# Altium PCB ISL6236A_DEMO.PcbDoc (part 1 of 2)
Units mm, origin at the board's own origin, x right, y up, seen from the top; angles counter-clockwise.
Board outline 50 x 50 mm, 6 copper layers (Top Layer (L1), GND (L2), L3, L4, GND (L5), Bottom Layer (L6)), stack 0.876 mm thick; 41 components, 27 nets, 119 pads, 105 vias.
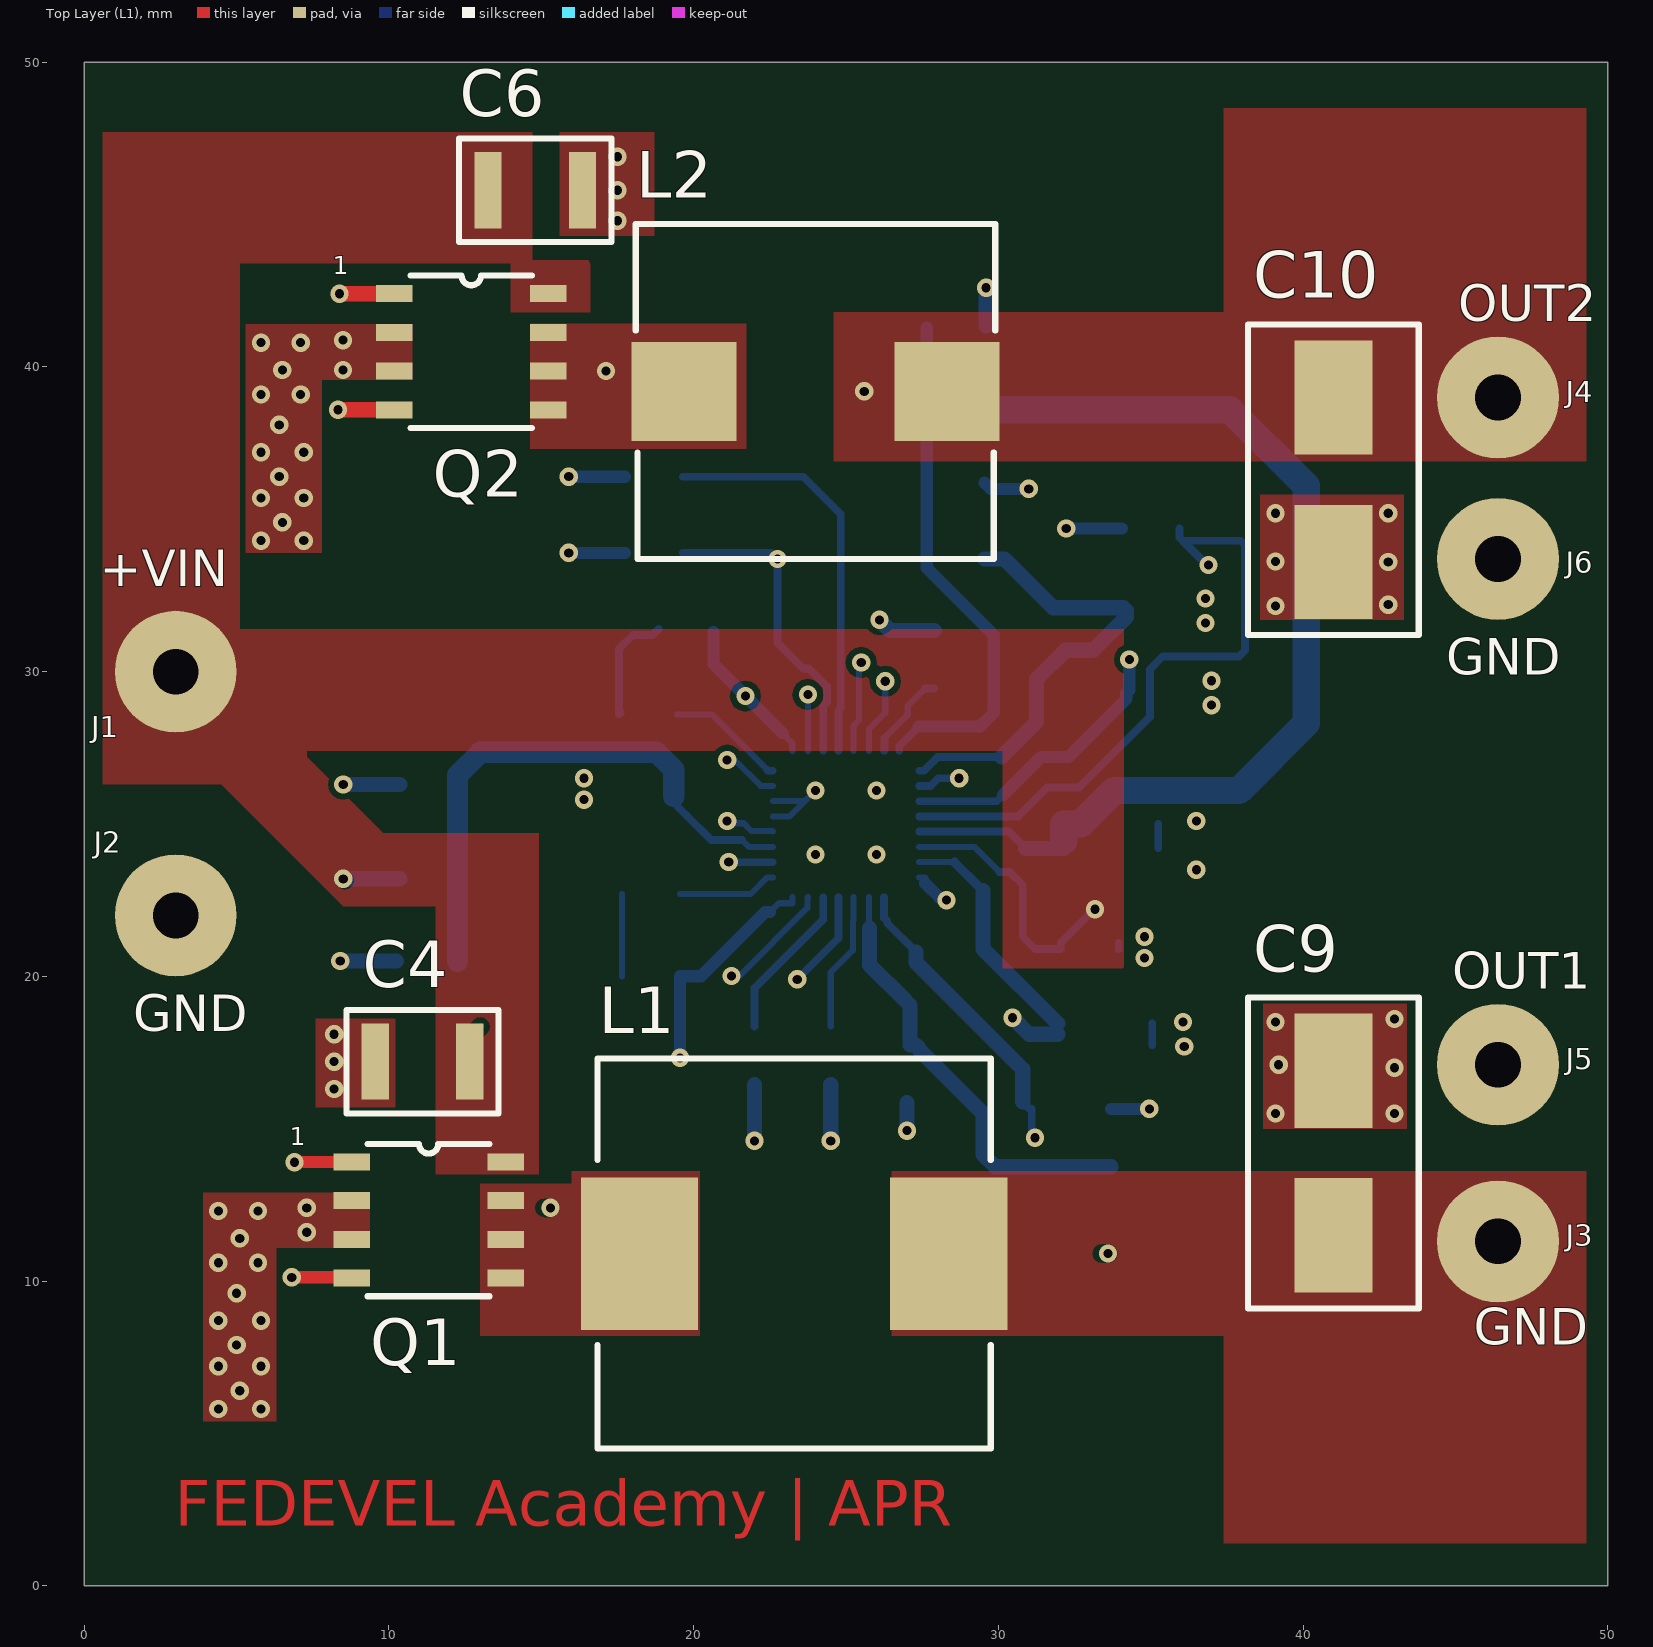
[diagram p0: Top Layer (L1) view]
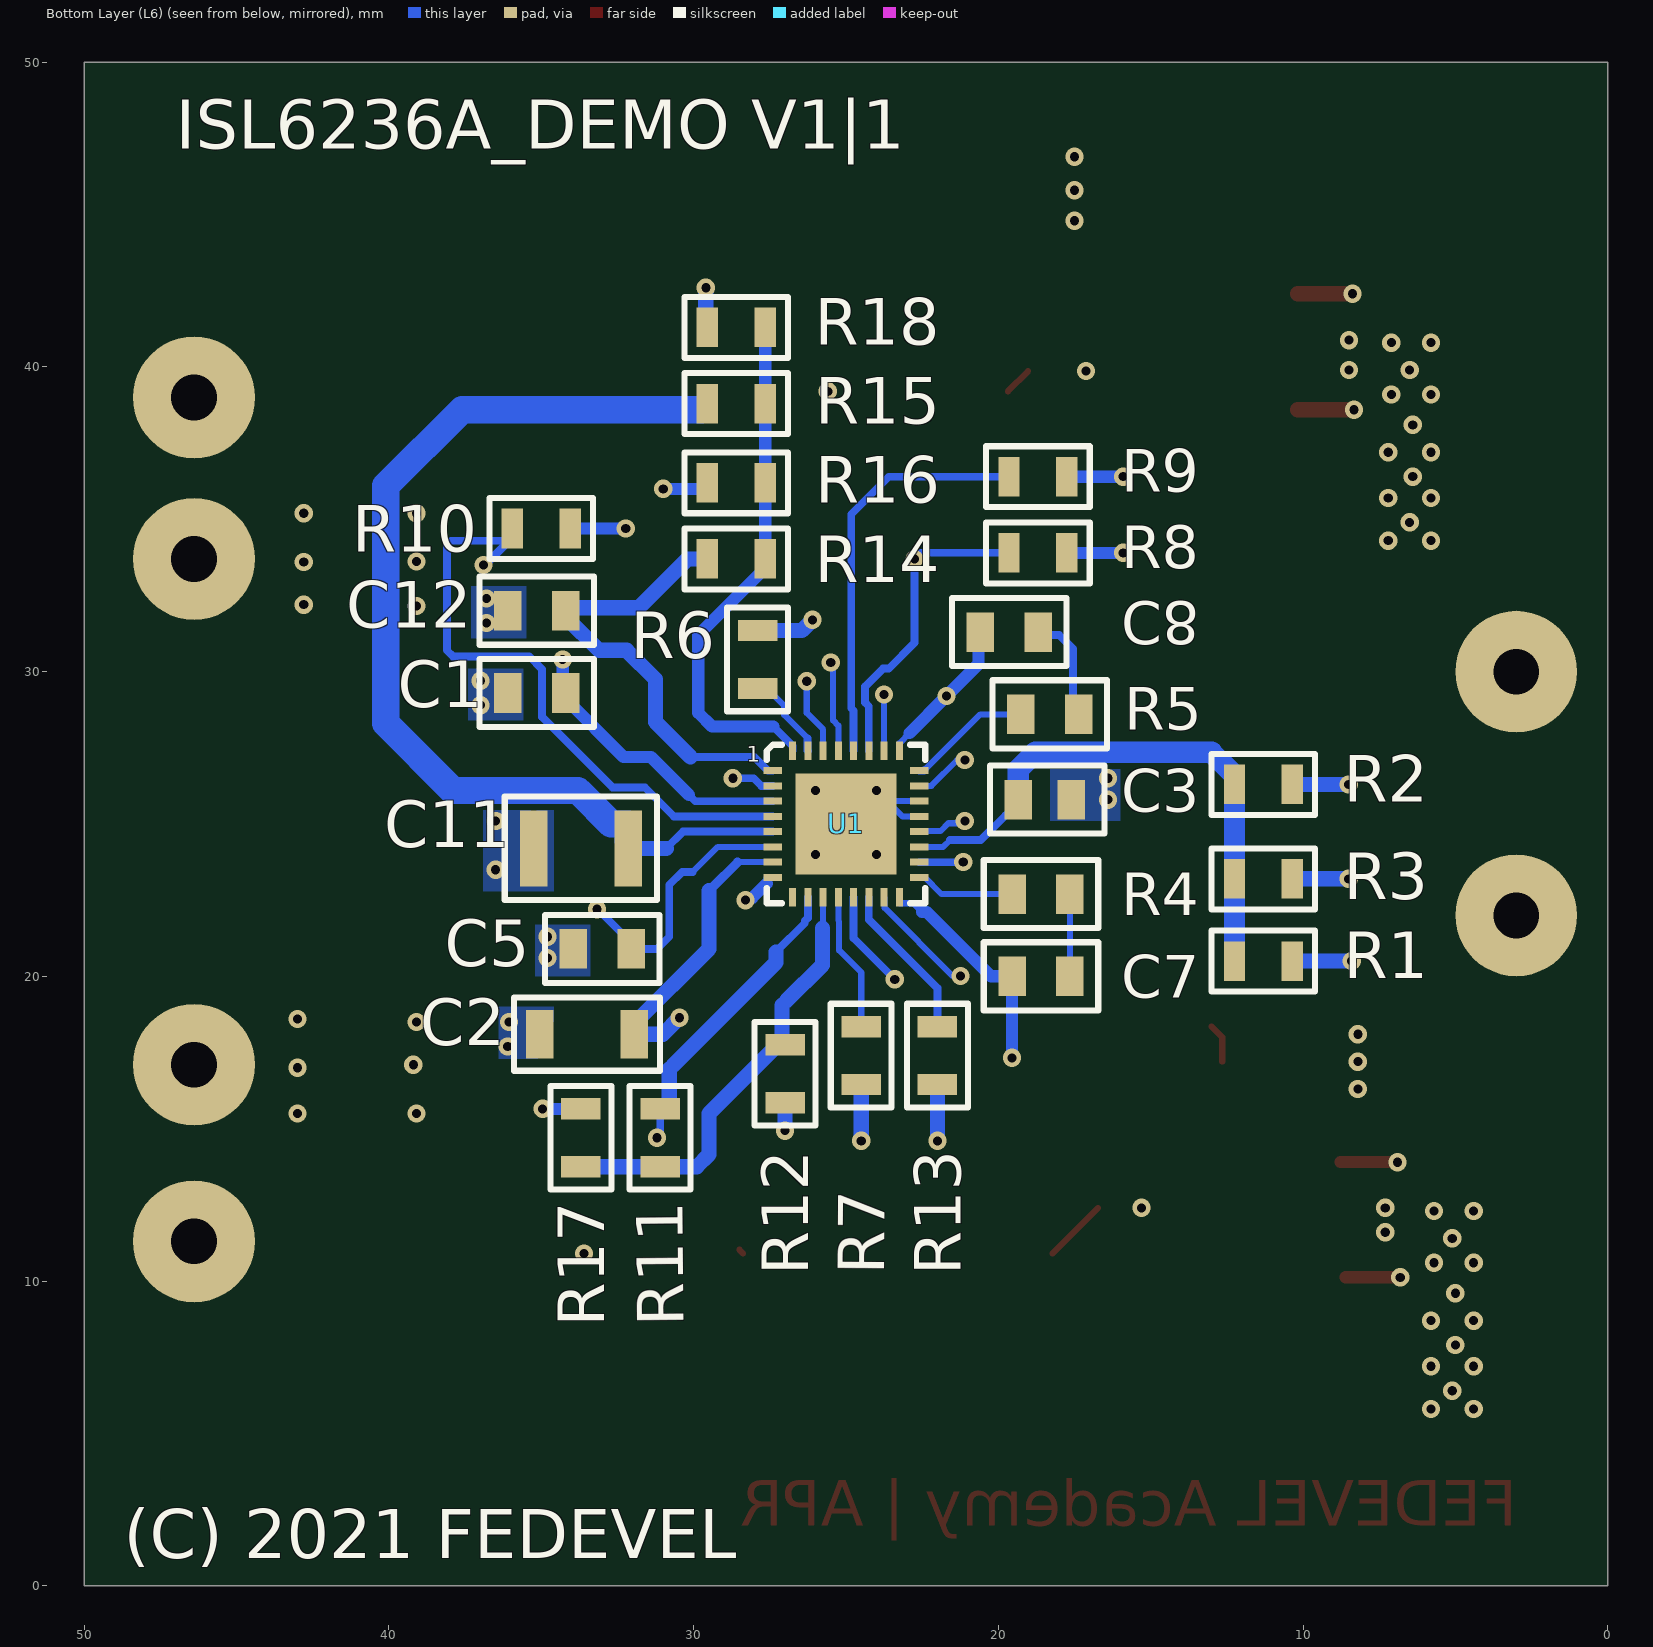
[diagram p1: Bottom Layer (L6) view, seen from below]
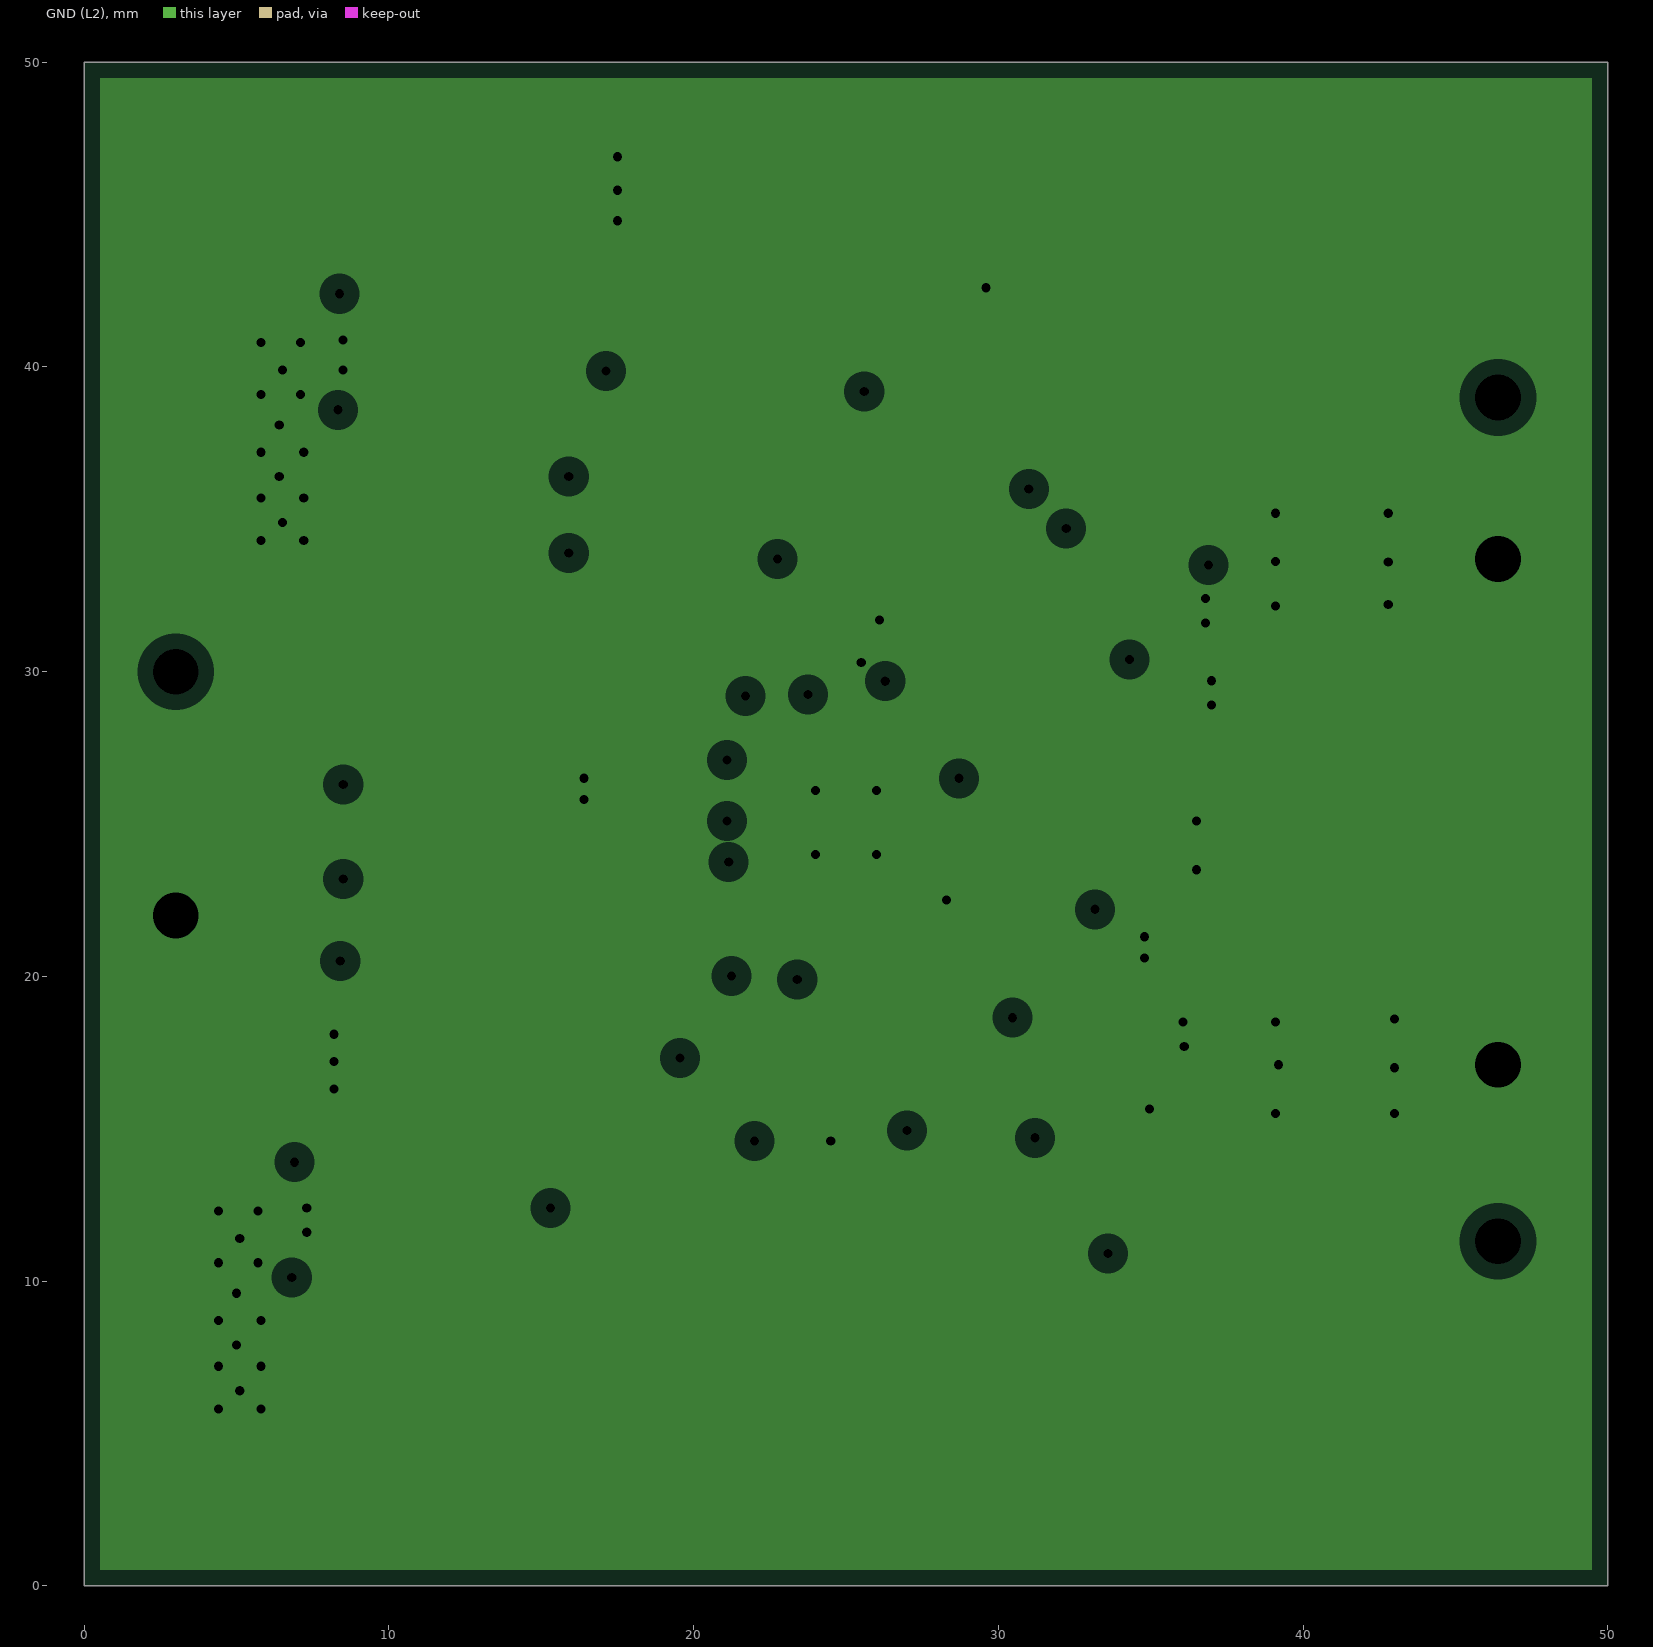
[diagram p2: GND (L2), clearances drawn from the general rule]
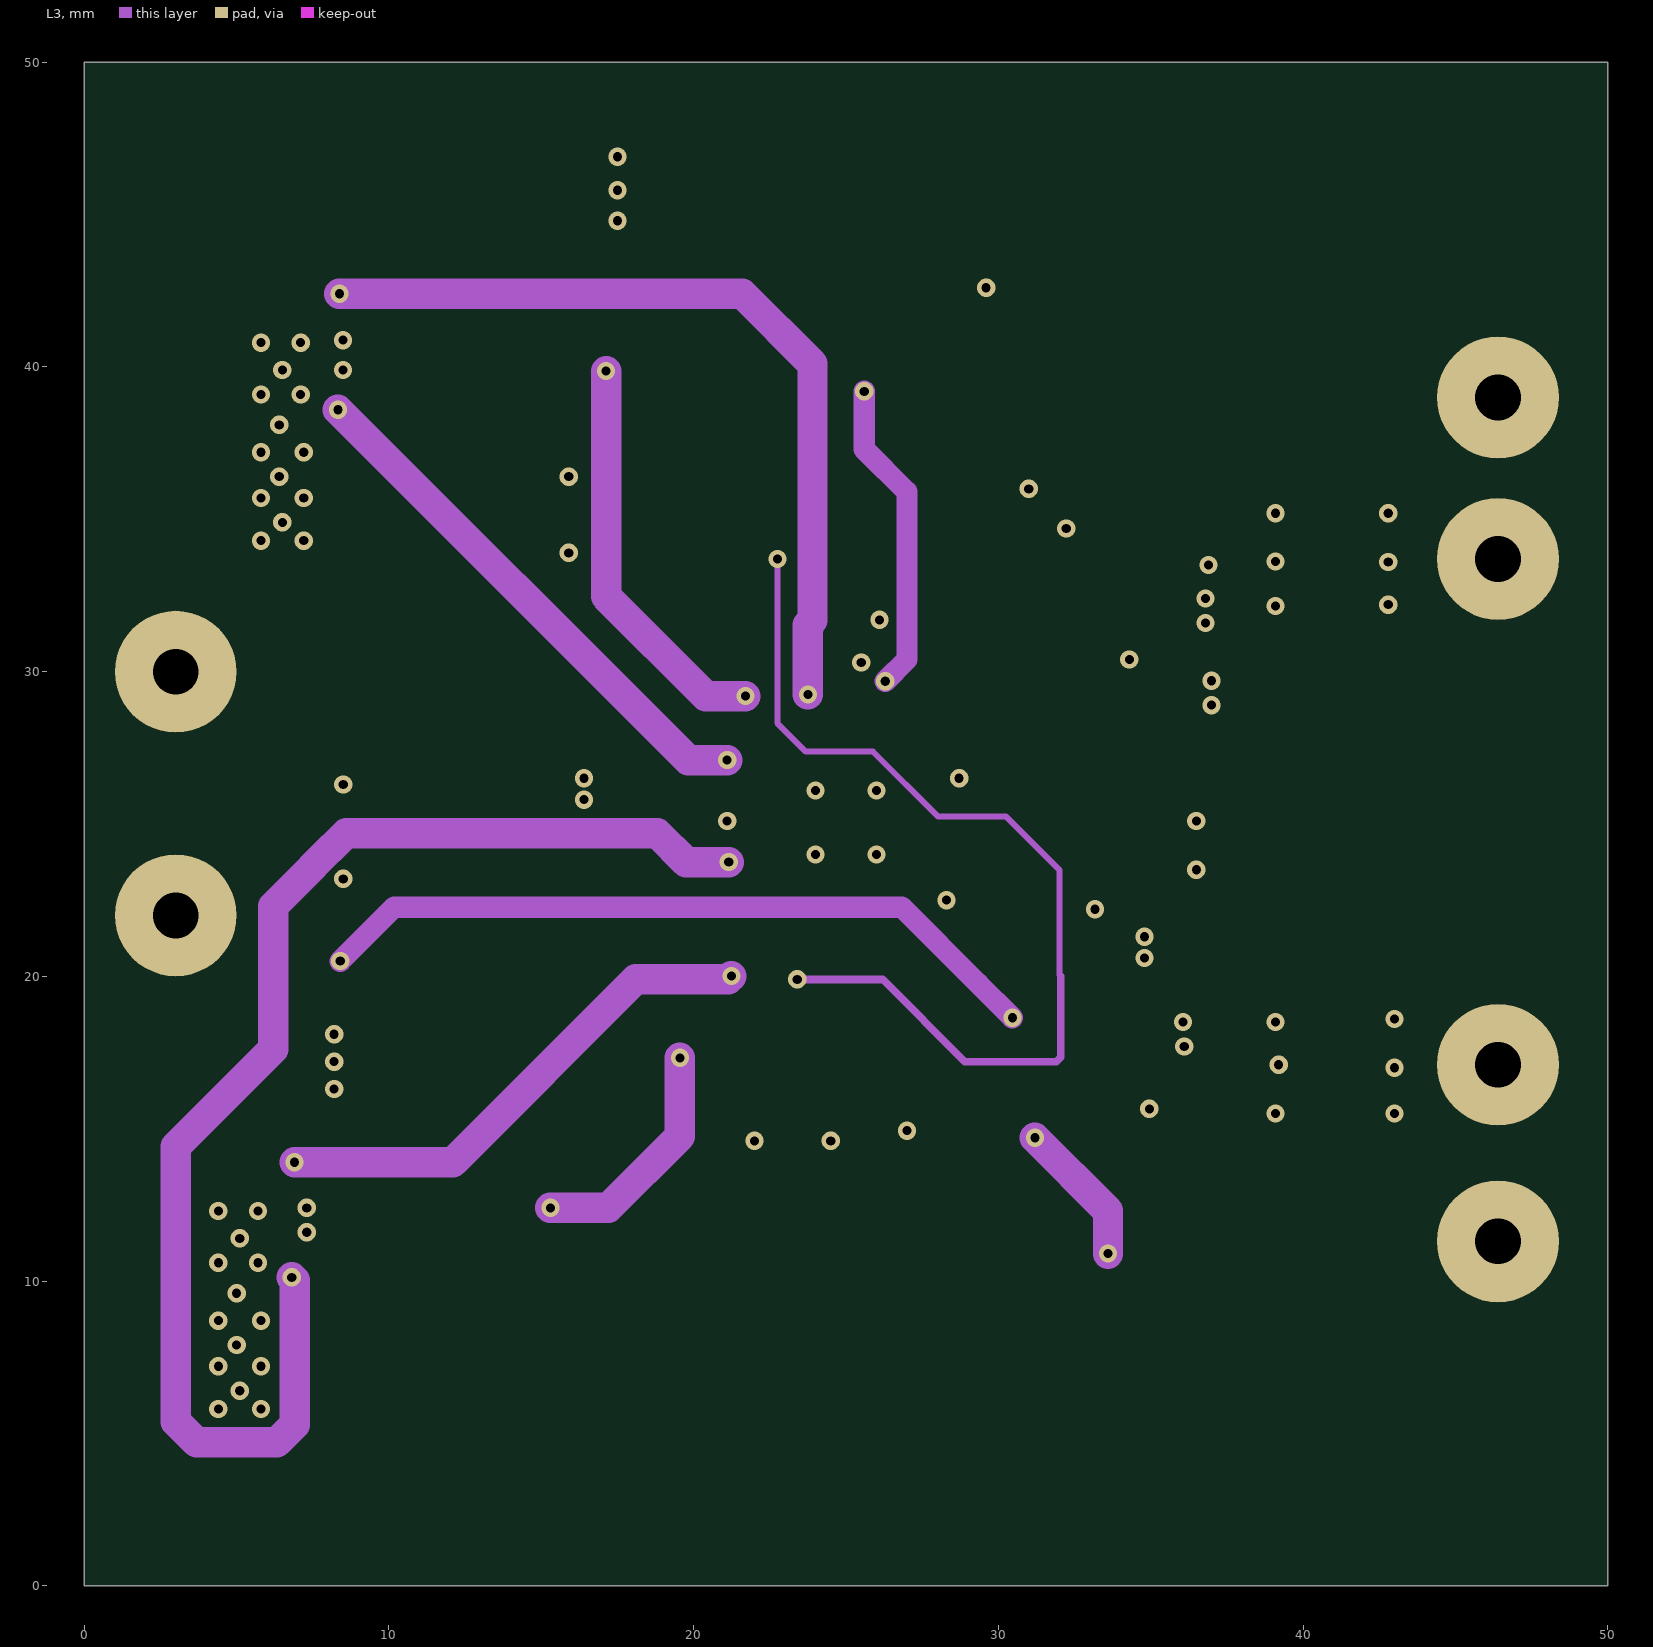
[diagram p3: L3]
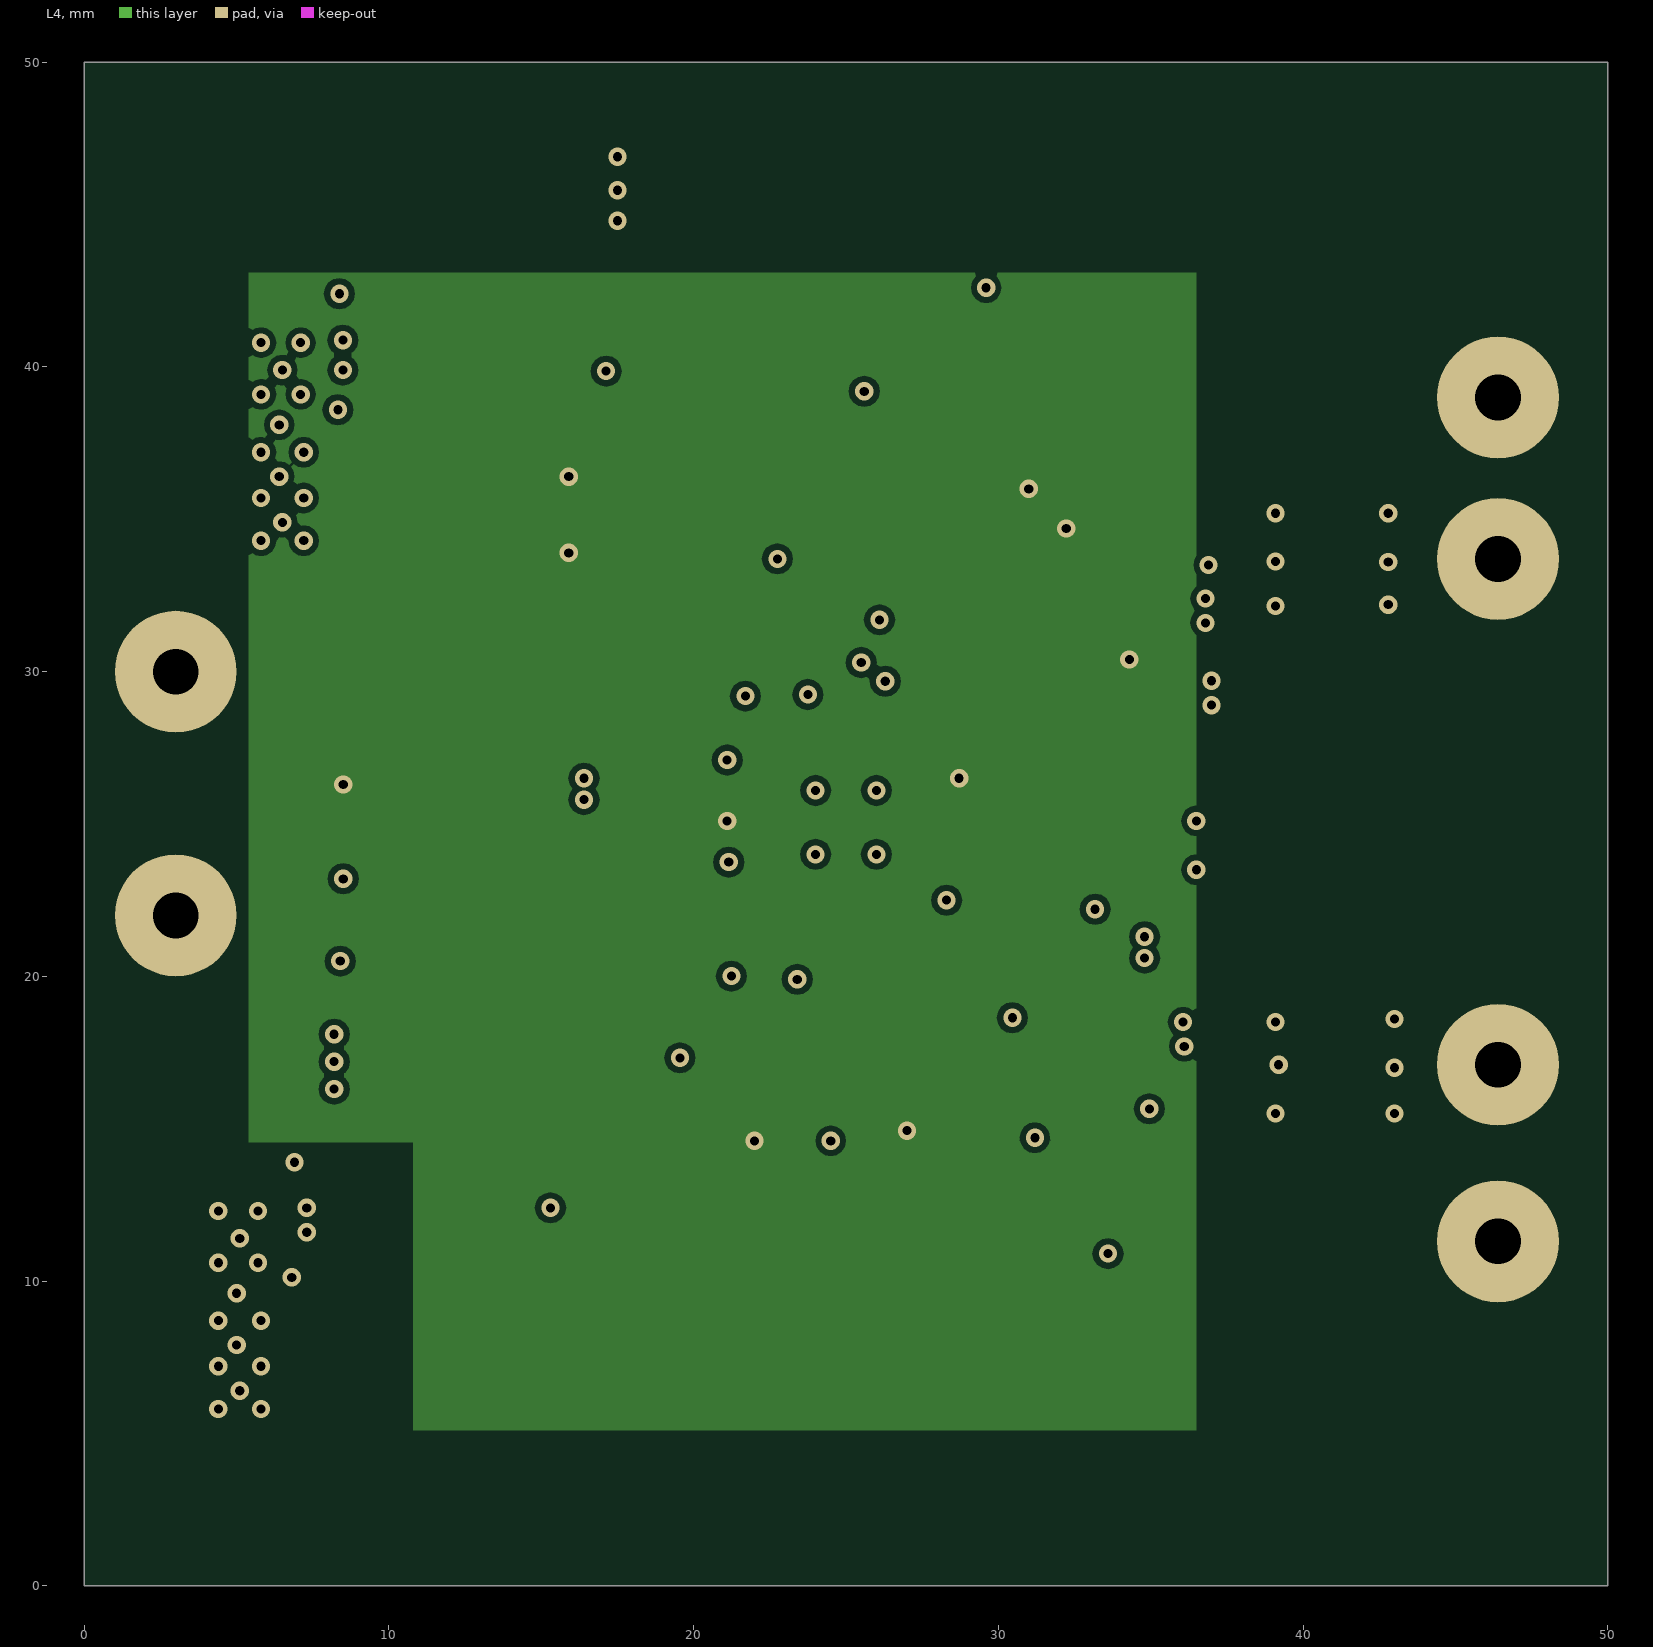
[diagram p4: L4]
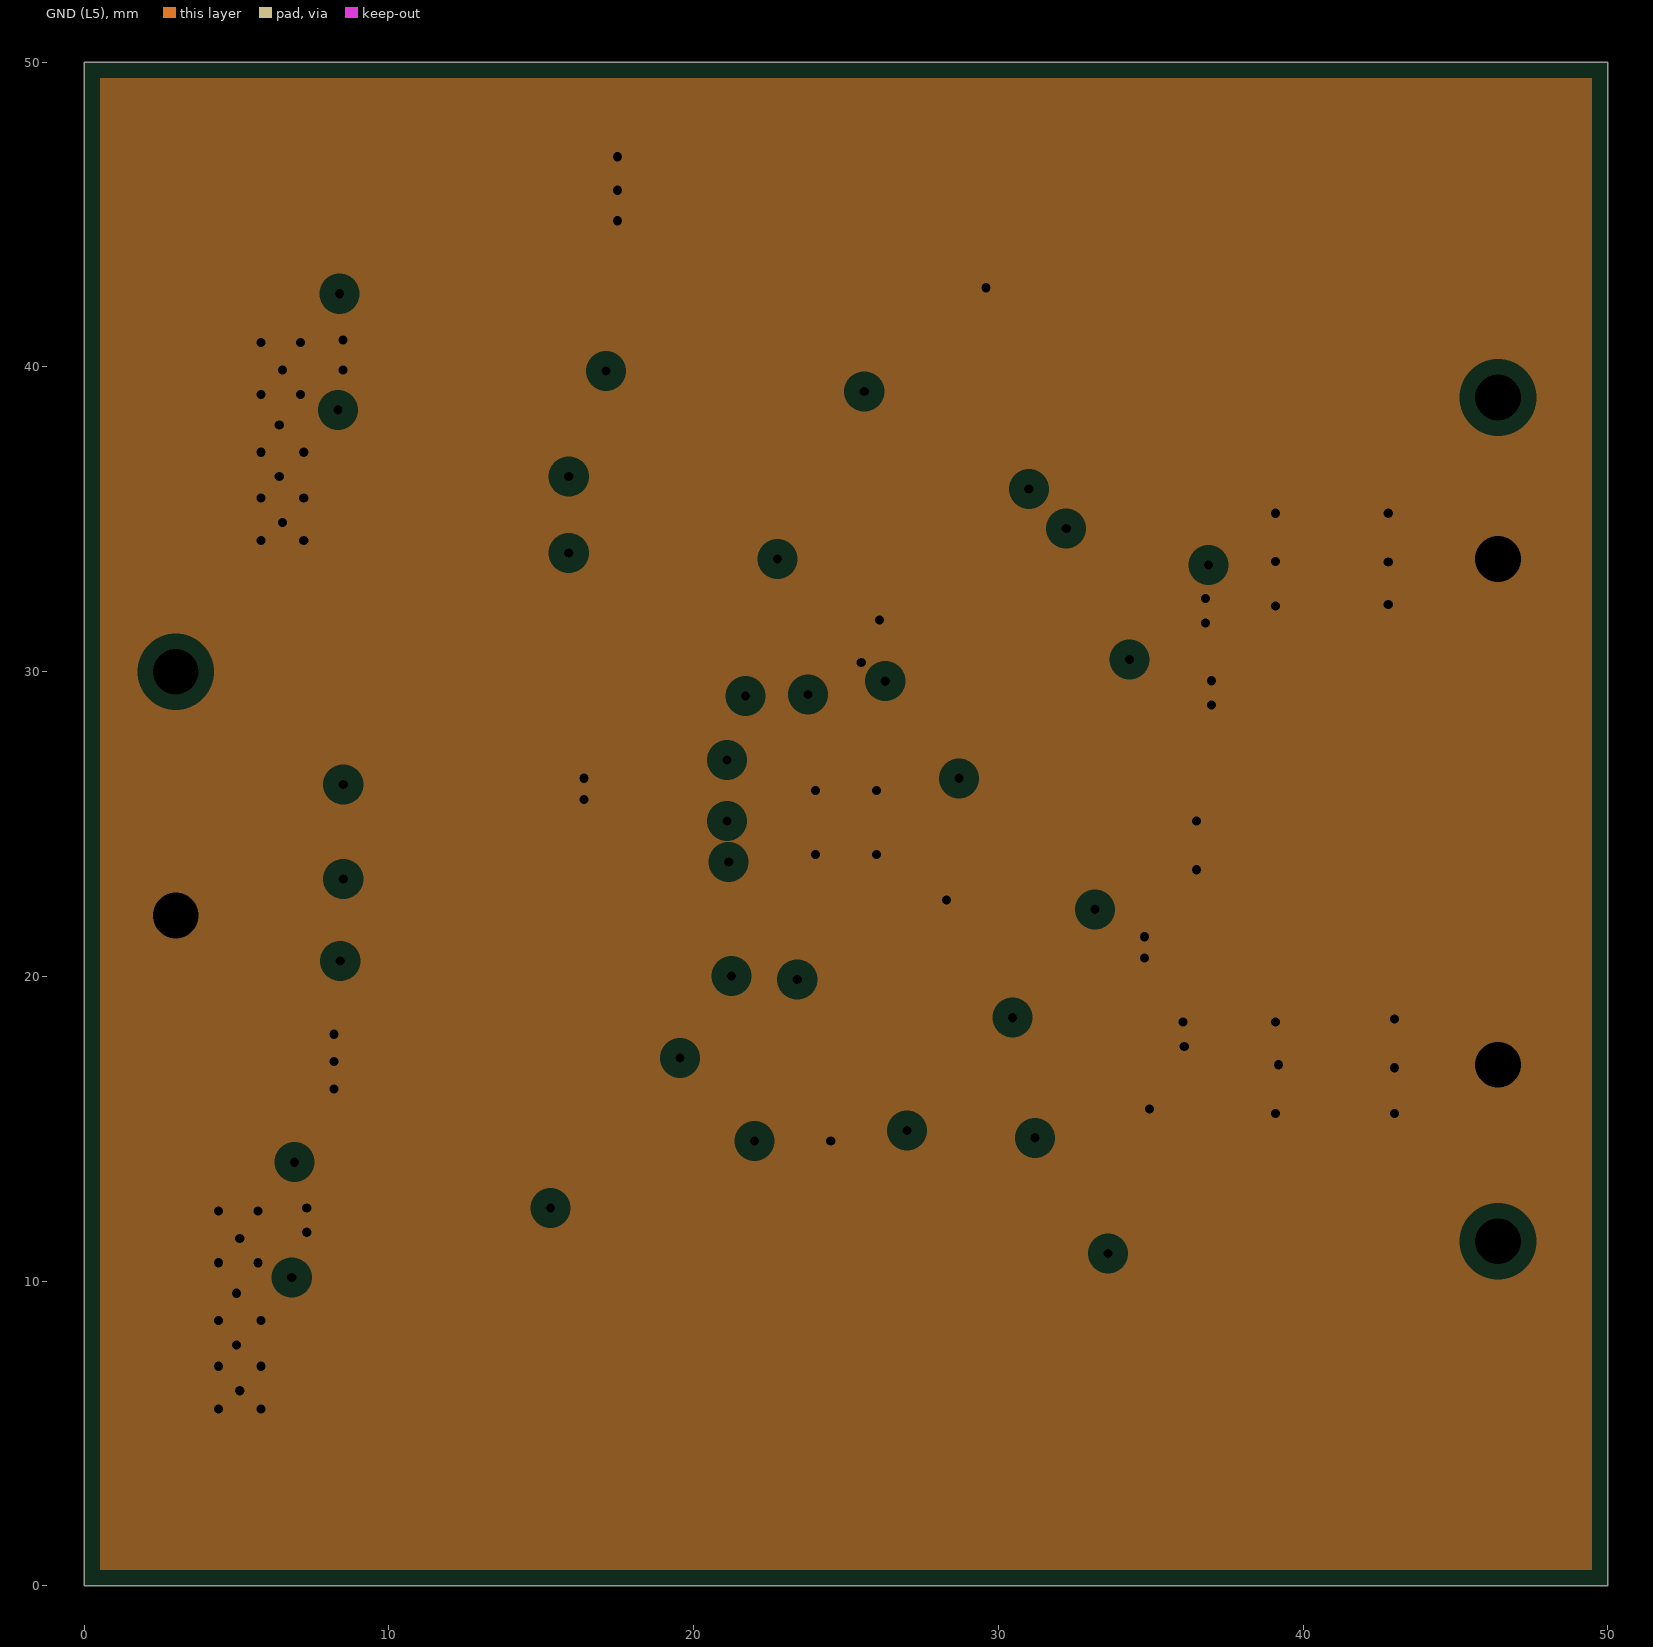
[diagram p5: GND (L5), clearances drawn from the general rule]

## Layer stack, top to bottom
Top Solder: solder mask 0.01, Solder Resist, Dk 3.5
Top Layer (L1): signal copper 0.035
Dielectric 2: core 0.102, Core-009, Dk 4.5
GND (L2): plane copper 0.035, net GND
Dielectric 4: prepreg 0.071, PP-006, Dk 4.1
L3: signal copper 0.035
Dielectric 1: dielectric 0.32, FR-4, Dk 4.8
L4: signal copper 0.035
Dielectric 5: prepreg 0.071, PP-006, Dk 4.1
GND (L5): plane copper 0.035, net GND
Dielectric 3: core 0.102, Core-009, Dk 4.5
Bottom Layer (L6): signal copper 0.035
Bottom Solder: solder mask 0.01, Solder Resist, Dk 3.5

## Board outline
0,0 50,0 50,50 0,50
cut-out: 77.5,77.5

## Design rules (kind name [scope] priority, off if disabled: settings)
Clearance [All] p1: gap=0.2 ignorepadtopadclearanceinfootprint=FALSE except(0: Arc-Hole Track-Hole SMDPad-Hole THPad-Hole Via-Hole Fill-Hole Poly-Hole Region-Hole Text-Hole)
MinimumSolderMaskSliver [All] p1: minsoldermaskwidth=0.1
PlaneClearance [All] p1: clearance=0.508
PlaneConnect PlaneConnect_VIA [All] p1: pad.planeconnectstyle=Relief pad.reliefexpansion=0.508 pad.reliefentries=4 pad.reliefconductorwidth=0.254 pad.reliefairgap=0.254 via.planeconnectstyle=Direct via.reliefexpansion=0.508 via.reliefentries=4 via.reliefconductorwidth=0.254 via.reliefairgap=0.254
PlaneConnect [All] p2: planeconnectstyle=Relief reliefexpansion=0.508 reliefentries=4 reliefconductorwidth=0.254 reliefairgap=0.254
PolygonConnect [All] p1: connectstyle=Direct reliefconductorwidth=0.254 reliefentries=4 polygonreliefangle="90 Angle" airgapwidth=0.254
RoutingVias [All] p1: holewidth=0.3 width=0.6 viastyle="Through Hole" minholewidth=0.3 minwidth=0.6 maxholewidth=0.3 maxwidth=0.6
SilkToSolderMaskClearance [IsPad] p1: minsilkscreentomaskgap=0.1 clearancetoexposedcopper=TRUE
SolderMaskExpansion [All] p1: expansion=0.102 istentingtop=FALSE
UnRoutedNet [All] p1 off:
Width [All] p1: maxlimit=10 minlimit=0.2 preferedwidth=0.2
25 further rules are at their usual default settings.

## Components (designator, comment, footprint, x,y, rotation, side; value= is the part's Value field where it differs from the comment)
C1 "1 µF" C0805#1 35.15,29.3 r180 bottom
C2 "470nF" C1206 33.5,18.1 r180 bottom
C3 "1uF,50V" C0805#2 18.4,25.8 r0 bottom
C4 "10uF 50V" C1210 11.1,17.2 r0 top
C5 "1uF,50V" C0805#1 33,20.9 r180 bottom
C6 "10uF 50V" C1210 14.8,45.8 r180 top
C7 "100nF" C0805#1 18.6,20 r180 bottom
C8 "220nF" C0805#1 19.64,31.3 r0 bottom
C9 "330uF, 10V" C7343-43 41,14.2 r90 top
C10 "330uF, 10V" C7343-43 41,36.3 r270 top
C11 "10uF 50V" C1210 33.7,24.2 r0 bottom
C12 "100nF" C0805#1 35.15,32 r0 bottom
J1 "4MMx1.5MM" PAD_WITH_HOLE_4MM_1.5MM#1 4,29 r0 top
J2 "4MMx1.5MM" PAD_WITH_HOLE_4MM_1.5MM#2 4,24 r0 top
J3 "4MMx1.5MM" PAD_WITH_HOLE_4MM_1.5MM#3 45.4,11.3 r0 top
J4 "4MMx1.5MM" PAD_WITH_HOLE_4MM_1.5MM#4 45,39.2 r0 top
J5 "4MMx1.5MM" PAD_WITH_HOLE_4MM_1.5MM#5 45.6,17.1 r0 top
J6 "4MMx1.5MM" PAD_WITH_HOLE_4MM_1.5MM#6 44.4,33.7 r0 top
L1 "3u3" "Inductor 744313330" 23.3,10.9 r180 top
L2 "2u2" "Inductor PCC-M1040M-LP" 24,39.2 r0 top
Q1 "SI4816BDY-T1-E3" SO-8 11.3,12 r0 top
Q2 "SI4816BDY-T1-E3" SO-8 12.7,40.5 r0 top
R1 "0R" R0805 11.3,20.5 r180 bottom
R2 "10R" R0805 11.3,26.3 r180 bottom
R3 "0R" R0805 11.3,23.2 r0 bottom
R4 "1R" C0805#1 18.6,22.7 r0 bottom
R5 "1R" C0805#1 18.316,28.602 r180 bottom
R6 "200k" R0805 27.9,30.4 r90 bottom
R7 "200k" R0805 24.5,17.4 r90 bottom
R8 "200k" R0805 18.7,33.9 r180 bottom
R9 "200k" R0805 18.7,36.4 r180 bottom
R10 "10R" R0805 35,34.7 r0 bottom
R11 "DNF" R0805 31.1,14.7 r90 bottom
R12 "0R" R0805 27,16.8 r270 bottom
R13 "10R" R0805 22,17.4 r90 bottom
R14 "DNF" R0805 28.6,33.7 r0 bottom
R15 "0R" R0805 28.6,38.8 r0 bottom
R16 "DNF" R0805 28.6,36.2 r0 bottom
R17 "DNF" R0805 33.7,14.7 r270 bottom
R18 "DNF" R0805 28.6,41.3 r180 bottom
U1 "ISL6236AIRZ" "ISL5236A L32.5X5B - duplicate" 25,25 r180 bottom

## Footprints (in the part's own frame and the unit in brackets; to place one, negate y for a bottom-side part, rotate by r counter-clockwise, add the part's x,y. Pads: shape width x height; smd on the part's side, far side on the other; paste and mask are expansions set on the pad)
C0805#1 [mm]
  rect 0.9x1.3 smd: 1(-0.95,0) 2(0.95,0)
  silkscreen extent -1.88,-1.12 1.88,1.12
C0805#2 [mm]
  rect 0.9x1.3 smd: 1(-0.8,0) 2(0.95,0)
  silkscreen extent -1.88,-1.12 1.88,1.12
C1206 [mm]
  rect 0.9x1.6 smd: 1(-1.55,0) 2(1.55,0)
  silkscreen extent -2.4,-1.2 2.4,1.2
C1210 [mm]
  rect 0.9x2.5 smd: 1(-1.55,0) 2(1.55,0)
  silkscreen extent -2.5,-1.7 2.5,1.7
C7343-43 [mm]
  rect 3.75x2.55 smd: 1(-2.7,0) 2(2.7,0)
  silkscreen extent -5.1,-2.8 5.1,2.8
"Inductor 744313330" [mm]
  rect 3.85x5 smd: 1(-5.075,0) 2(5.075,0)
  silkscreen extent -6.45,-6.4 6.45,6.4
"Inductor PCC-M1040M-LP" [mm]
  rect 3.439x3.254 smd: 1(-4.313,0) 2(4.313,0)
  silkscreen extent -5.9,-5.5 5.9,5.5
"ISL5236A L32.5X5B - duplicate" [mm]
  rect 0.6x0.23 smd mask+0.051: 1(-2.4,1.75) 2(-2.4,1.25) 3(-2.4,0.75) 4(-2.4,0.25) 5(-2.4,-0.25) 6(-2.4,-0.75) 7(-2.4,-1.25) 8(-2.4,-1.75) 17(2.4,-1.75) 18(2.4,-1.25) 19(2.4,-0.75) 20(2.4,-0.25) 21(2.4,0.25) 22(2.4,0.75) 23(2.4,1.25) 24(2.4,1.75)
  rect 0.23x0.6 smd mask+0.051: 9(-1.75,-2.4) 10(-1.25,-2.4) 11(-0.75,-2.4) 12(-0.25,-2.4) 13(0.25,-2.4) 14(0.75,-2.4) 15(1.25,-2.4) 16(1.75,-2.4) 25(1.75,2.4) 26(1.25,2.4) 27(0.75,2.4) 28(0.25,2.4) 29(-0.25,2.4) 30(-0.75,2.4) 31(-1.25,2.4) 32(-1.75,2.4)
  rect 3.3x3.3 smd mask+0.051: 33(0,0)
  silkscreen extent -2.6,-2.6 2.6,2.6
PAD_WITH_HOLE_4MM_1.5MM#1 [mm]
  round 4 hole 1.5: 1(-1,1)
PAD_WITH_HOLE_4MM_1.5MM#2 [mm]
  round 4 hole 1.5: 1(-1,-2)
PAD_WITH_HOLE_4MM_1.5MM#3 [mm]
  round 4 hole 1.5: 1(1,0)
PAD_WITH_HOLE_4MM_1.5MM#4 [mm]
  round 4 hole 1.5: 1(1.4,-0.2)
PAD_WITH_HOLE_4MM_1.5MM#5 [mm]
  round 4 hole 1.5: 1(0.8,0)
PAD_WITH_HOLE_4MM_1.5MM#6 [mm]
  round 4 hole 1.5: 1(2,0)
R0805 [mm]
  rect 0.7x1.3 smd: 1(-0.95,0) 2(0.95,0)
  silkscreen extent -1.7,-1 1.7,1
SO-8 [mm]
  rect 1.194x0.559 smd: 1(-2.527,1.905) 2(-2.527,0.635) 3(-2.527,-0.635) 4(-2.527,-1.905) 5(2.527,-1.905) 6(2.527,-0.635) 7(2.527,0.635) 8(2.527,1.905)
  silkscreen extent -2,-2.5 2,2.5

## Part data
C1: library part 08053D105KAT2A, "AVX - 08053D105KAT2A - Condensatore Ceramico Multistrato SMD, 1 µF, 25 V, 0805 [2012 Metrico], ± 10%, X5R", Capacitance=1uF, Case Code (Imperial)=0805, Case Code (Metric)=2012, Dielectric=X5R, Manufacturer="Kyocera AVX", Max Operating Temperature=85°C, Min Operating Temperature=-55°C, Package Quantity=3000, Supplier Part Number 1=581-08053D105K, Tolerance=10%, Voltage=25V, Case/Package=0805, Category="Ceramic Capacitors", ComponentLink1Description=https://datasheet.ciiva.com/11786/0900766b80def1a5-11786776.pdf?src-supplier=RSComponents, ComponentLink1URL=https://datasheet.ciiva.com/11786/0900766b80def1a5-11786776.pdf?src-supplier=RSComponents, ComponentLink2Description=https://datasheet.ciiva.com/153/cx5r-153219.pdf?src-supplier=Digi-Key, ComponentLink2URL=https://datasheet.ciiva.com/153/cx5r-153219.pdf?src-supplier=Digi-Key, ComponentLink3Description=https://datasheet.ciiva.com/153/cx5r-153220.pdf?src-supplier=Digi-Key, ComponentLink3URL=https://datasheet.ciiva.com/153/cx5r-153220.pdf?src-supplier=Digi-Key, ComponentLink4Description=https://datasheet.ciiva.com/153/cx5r-153221.pdf?src-supplier=Digi-Key, ComponentLink4URL=https://datasheet.ciiva.com/153/cx5r-153221.pdf?src-supplier=Digi-Key, ComponentLink5Description=https://datasheet.ciiva.com/7255/1796776-7255029.pdf?src-supplier=Newark, ComponentLink5URL=https://datasheet.ciiva.com/7255/1796776-7255029.pdf?src-supplier=Newark, ComponentLink6Description=https://datasheet.ciiva.com/14600/70001028-14600197.pdf?src-supplier=Allied+Electronics, ComponentLink6URL=https://datasheet.ciiva.com/14600/70001028-14600197.pdf?src-supplier=Allied+Electronics, ComponentLink7Description=https://datasheet.ciiva.com/15165/getdatasheetpartid-50524-15165237.pdf?src-supplier=Verical, ComponentLink7URL=https://datasheet.ciiva.com/15165/getdatasheetpartid-50524-15165237.pdf?src-supplier=Verical, ComponentLink8Description=https://datasheet.ciiva.com/14586/70001028-14586727.pdf?src-supplier=Allied+Electronics, ComponentLink8URL=https://datasheet.ciiva.com/14586/70001028-14586727.pdf?src-supplier=Allied+Electronics, ComponentLink9Description=https://datasheet.ciiva.com/16537/cx5r-16537015.pdf?src-supplier=Avnet+Asia, ComponentLink9URL=https://datasheet.ciiva.com/16537/cx5r-16537015.pdf?src-supplier=Avnet+Asia, ComponentLink10Description=https://datasheet.ciiva.com/7812/1666675-7812010.pdf?src-supplier=Element14, ComponentLink10URL=https://datasheet.ciiva.com/7812/1666675-7812010.pdf?src-supplier=Element14, ComponentLink11Description=https://datasheet.ciiva.com/7812/84508-7812011.pdf?src-supplier=Element14, ComponentLink11URL=https://datasheet.ciiva.com/7812/84508-7812011.pdf?src-supplier=Element14, ComponentLink12Description=https://datasheet.ciiva.com/2987/cx5r-2987964.pdf?src-supplier=Avnet, ComponentLink12URL=https://datasheet.ciiva.com/2987/cx5r-2987964.pdf?src-supplier=Avnet, ComponentLink13Description=https://datasheet.ciiva.com/7812/84508-7812012.pdf?src-supplier=Element14, ComponentLink13URL=https://datasheet.ciiva.com/7812/84508-7812012.pdf?src-supplier=Element14, ComponentLink14Description=https://datasheet.ciiva.com/11499/cx5r-11499853.pdf?src-supplier=Avnet, ComponentLink14URL=https://datasheet.ciiva.com/11499/cx5r-11499853.pdf?src-supplier=Avnet, ComponentLink15Description=https://datasheet.ciiva.com/28586/759405-28586814.pdf?src-supplier=Element14, ComponentLink15URL=https://datasheet.ciiva.com/28586/759405-28586814.pdf?src-supplier=Element14, Construction=Flat, Contact Plating=Tin,Matte, Depth=1.25mm, Height=1.4mm, Lead Free="Lead Free", Length=2.01mm, Manufacturer Part Number=08053D105KAT2A, Mount="Surface Mount,PCB", Number of Pins=2, Packaging="Tape and Reel", Pricing 1="1=0.52000, 10=0.27900, 50=0.27900, 100=0.22100, 1000=0.15200, 10000=0.10300 (USD)", Radiation Hardening=No, REACH SVHC="No SVHC", RoHS=Yes, RoHS Compliant=Yes, Series=-, Stock 1=6380, Supplier 1=Mouser, Termination=SMD/SMT, Thickness=0.055inch, Voltage Rating=25V, Voltage Rating (DC)=25V, Width=0.049inch
C2: library part LMK316BJ475KD-T, "Cap Ceramic 4.7uF 10V X5R 10% SMD 1206 85C T/R", Capacitance=4.7uF, Case Code (Imperial)=1206, Case Code (Metric)=3216, Dielectric=X5R, Manufacturer="Taiyo Yuden", Max Operating Temperature=85°C, Min Operating Temperature=-55°C, Package Quantity=1, Resistor Type=Ceramic, Supplier Part Number 1=587-1340-1-ND, Tolerance=10%, Voltage Rating=10V, Case/Package=1206, Category="Ceramic Capacitors", ComponentLink1Description=https://datasheet.ciiva.com/137/lmk316bj475kd-t-ss-137640.pdf?src-supplier=Digi-Key, ComponentLink1URL=https://datasheet.ciiva.com/137/lmk316bj475kd-t-ss-137640.pdf?src-supplier=Digi-Key, ComponentLink2Description=https://datasheet.ciiva.com/26919/getdatasheetpartid-638474-26919229.pdf?src-supplier=Verical, ComponentLink2URL=https://datasheet.ciiva.com/26919/getdatasheetpartid-638474-26919229.pdf?src-supplier=Verical, ComponentLink3Description=https://datasheet.ciiva.com/30226/498lmk316bj475kd-t-30226925.pdf?src-supplier=Onlinecomponents.com, ComponentLink3URL=https://datasheet.ciiva.com/30226/498lmk316bj475kd-t-30226925.pdf?src-supplier=Onlinecomponents.com, ComponentLink4Description=https://datasheet.ciiva.com/7975/1481447-7975789.pdf?src-supplier=Element14, ComponentLink4URL=https://datasheet.ciiva.com/7975/1481447-7975789.pdf?src-supplier=Element14, ComponentLink5Description=https://datasheet.ciiva.com/11596/mlcc-all-e-11596885.pdf?src-supplier=Avnet, ComponentLink5URL=https://datasheet.ciiva.com/11596/mlcc-all-e-11596885.pdf?src-supplier=Avnet, Construction=Flat, Depth=1.6mm, Halogen Free="Halogen Free", Height=0.85mm, Lead Free="Lead Free", Length=3.2mm, Manufacturer Part Number=LMK316BJ475KD-T, Mount="Surface Mount", Number of Pins=2, Packaging="Tape and Reel", Pricing 1="1=0.35000, 10=0.24000, 50=0.16000, 100=0.13610, 500=0.09604, 1000=0.08404 (USD)", Radiation Hardening=No, REACH SVHC="No SVHC", RoHS=Yes, RoHS Compliant=Yes, Series=M, Stock 1=29799, Supplier 1=Digi-Key, Termination=SMD/SMT, Thickness=0.037inch, Voltage Rating (DC)=10V, Width=0.063inch
C3 C5: library part C2012X7R1H105K125AB, "TDK - C2012X7R1H105K125AB - SMD Multilayer Ceramic Capacitor, 1 µF, 50 V, 0805 [2012 Metric], ± 10%, X7R, C Series TDK", Capacitance=1uF, Case Code (Imperial)=0805, Case Code (Metric)=2012, Dielectric=X7R, Dielectric Material=Ceramic, Manufacturer=TDK, Max Operating Temperature=125°C, Min Operating Temperature=-55°C, Package Quantity=1, Supplier Part Number 1=445-7547-1-ND, Tolerance=10%, Voltage Rating=50V, Case/Package=0805, Category="Ceramic Capacitors", ComponentLink1Description=https://datasheet.ciiva.com/22718/1796654-22718037.pdf?src-supplier=Element14, ComponentLink1URL=https://datasheet.ciiva.com/22718/1796654-22718037.pdf?src-supplier=Element14, ComponentLink2Description=https://datasheet.ciiva.com/6274/tdkmlcccaprange-6274890.pdf?src-supplier=Digi-Key, ComponentLink2URL=https://datasheet.ciiva.com/6274/tdkmlcccaprange-6274890.pdf?src-supplier=Digi-Key, ComponentLink3Description=https://datasheet.ciiva.com/23803/1796654-23803036.pdf?src-supplier=Newark, ComponentLink3URL=https://datasheet.ciiva.com/23803/1796654-23803036.pdf?src-supplier=Newark, ComponentLink4Description=https://datasheet.ciiva.com/28673/mlcc-commercial-general-en-28673565.pdf?src-supplier=Element14, ComponentLink4URL=https://datasheet.ciiva.com/28673/mlcc-commercial-general-en-28673565.pdf?src-supplier=Element14, ComponentLink5Description=https://datasheet.ciiva.com/6274/tdkmlcccaprange-6274886.pdf?src-supplier=Digi-Key, ComponentLink5URL=https://datasheet.ciiva.com/6274/tdkmlcccaprange-6274886.pdf?src-supplier=Digi-Key, ComponentLink6Description=https://datasheet.ciiva.com/6274/tdkmlcccaprange-6274888.pdf?src-supplier=Digi-Key, ComponentLink6URL=https://datasheet.ciiva.com/6274/tdkmlcccaprange-6274888.pdf?src-supplier=Digi-Key, ComponentLink7Description=https://datasheet.ciiva.com/24191/general-b11-24191449.pdf?src-supplier=Future+Electronics, ComponentLink7URL=https://datasheet.ciiva.com/24191/general-b11-24191449.pdf?src-supplier=Future+Electronics, Construction=Flat, Depth=1.25mm, Height=1.25mm, Lead Free="Lead Free", Length=2mm, Manufacturer Part Number=C2012X7R1H105K125AB, Mount="Surface Mount", Number of Pins=2, Packaging="Tape and Reel", Pricing 1="1=0.31000, 10=0.21500, 50=0.14360, 100=0.12200, 500=0.08612, 1000=0.07535 (USD)", Radiation Hardening=No, REACH SVHC="No SVHC", Resistor Type=Ceramic, RoHS=Yes, RoHS Compliant=Yes, Series=C, Stock 1=15992, Supplier 1=Digi-Key, Termination=SMD/SMT, Thickness=0.057inch, Voltage Rating (DC)=50V, Weight=0.000194oz, Width=0.049inch
C4 C6 C11: library part UMK325BJ106MMHP, "CAP CER 10UF 50V X5R 1210", Capacitance=10uF, Case Code (Imperial)=1210, Case Code (Metric)=3225, Manufacturer="Taiyo Yuden", Max Operating Temperature=85°C, Min Operating Temperature=-55°C, Ratings=AEC-Q200, Supplier Part Number 1=587-6033-1-ND, Tolerance=20%, Voltage Rating=50V, Case/Package=1210, Category="Ceramic Capacitors", ComponentLink1Description=http://ds.yuden.co.jp/TYCOMPAS/ut/detail.do?productNo=UMK325BJ106MMHP&fileName=UMK325BJ106MMHP_SS&mode=specSheetDownload&src-supplier=Digi-Key, ComponentLink1URL=http://ds.yuden.co.jp/TYCOMPAS/ut/detail.do?productNo=UMK325BJ106MMHP&fileName=UMK325BJ106MMHP_SS&mode=specSheetDownload&src-supplier=Digi-Key, ComponentLink2Description=http://ds.yuden.co.jp/TYCOMPAS/ut/detail.do?productNo=UMK325BJ106MMHP&amp;fileName=UMK325BJ106MMHP_SS&amp;mode=specSheetDownload&src-supplier=Digi-Key, ComponentLink2URL=http://ds.yuden.co.jp/TYCOMPAS/ut/detail.do?productNo=UMK325BJ106MMHP&amp;fileName=UMK325BJ106MMHP_SS&amp;mode=specSheetDownload&src-supplier=Digi-Key, Manufacturer Part Number=UMK325BJ106MMHP, Mount="Surface Mount", Packaging="Cut Tape", Pricing 1="1=0.59000, 10=0.42000, 50=0.31760, 100=0.27670, 500=0.20492 (USD)", RoHS=Yes, RoHS Compliant=No, Stock 1=9869, Supplier 1=Digi-Key
C7 C12: library part 08055C104KAT4A, "AVX - 08055C104KAT4A - Multilayer Ceramic Capacitor, 0.1 F, 10%, X7R, 50 V, 0805 [2012 Metric] RoHS Compliant: Yes", Case Code (Imperial)=0805, Case Code (Metric)=2012, Dielectric=X7R, Dielectric Material=Ceramic, Manufacturer="Kyocera AVX", Max Operating Temperature=125°C, Min Operating Temperature=-55°C, Package Quantity=15000, Supplier Part Number 1=478-10836-6-ND, Tolerance=10%, Voltage=50V, Capacitance=100nF, Case/Package=0805, Category="Ceramic Capacitors", ComponentLink1Description=https://datasheet.ciiva.com/2988/cx7r-2988016.pdf?src-supplier=Avnet, ComponentLink1URL=https://datasheet.ciiva.com/2988/cx7r-2988016.pdf?src-supplier=Avnet, ComponentLink2Description=https://datasheet.ciiva.com/28613/1679506-28613114.pdf?src-supplier=Element14, ComponentLink2URL=https://datasheet.ciiva.com/28613/1679506-28613114.pdf?src-supplier=Element14, ComponentLink3Description=https://datasheet.ciiva.com/5423/cx7r-218113-5423437.pdf?src-supplier=Mouser, ComponentLink3URL=https://datasheet.ciiva.com/5423/cx7r-218113-5423437.pdf?src-supplier=Mouser, ComponentLink4Description=https://datasheet.ciiva.com/16222/cx7r-16222253.pdf?src-supplier=Future+Electronics, ComponentLink4URL=https://datasheet.ciiva.com/16222/cx7r-16222253.pdf?src-supplier=Future+Electronics, ComponentLink5Description=https://datasheet.ciiva.com/22676/1679506-22676605.pdf?src-supplier=Element14, ComponentLink5URL=https://datasheet.ciiva.com/22676/1679506-22676605.pdf?src-supplier=Element14, ComponentLink6Description=https://datasheet.ciiva.com/2988/cx7r-2988015.pdf?src-supplier=Avnet, ComponentLink6URL=https://datasheet.ciiva.com/2988/cx7r-2988015.pdf?src-supplier=Avnet, Construction=Flat, Depth=1.25mm, Dissipation Factor=2.5%, Height=0.94mm, Lead Free="Lead Free", Length=2.01mm, Manufacturer Part Number=08055C104KAT4A, Mount="Surface Mount", Number of Pins=2, Packaging="Tape and Reel", Pricing 1="1=0.10000, 10=0.07600, 50=0.04140, 100=0.03380, 500=0.02416, 1000=0.01898, 2500=0.01725, 5000=0.01587 (USD)", Radiation Hardening=No, REACH SVHC="No SVHC", RoHS=Yes, RoHS Compliant=Yes, Stock 1=4587949, Supplier 1=Digi-Key, Termination=SMD/SMT, Voltage Rating=50V, Voltage Rating (DC)=50V, Width=1.25mm
C8: library part UMK212B7224KG-T, "TAIYO YUDEN - UMK212B7224KG-T - CERAMIC CAPACITOR 0.22UF, 50V, X7R, 10%, 0805, FULL REEL", Case Code (Imperial)=0805, Case Code (Metric)=2012, Dielectric=X7R, Manufacturer="Taiyo Yuden", Max Operating Temperature=125°C, Min Operating Temperature=-55°C, Package Quantity=1, Supplier Part Number 1=587-1287-1-ND, Tolerance=10%, Voltage=50V, Capacitance=220nF, Case/Package=0805, Category="Ceramic Capacitors", ComponentLink1Description=https://datasheet.ciiva.com/133/umk212b7224kg-t-ss-133747.pdf?src-supplier=Digi-Key, ComponentLink1URL=https://datasheet.ciiva.com/133/umk212b7224kg-t-ss-133747.pdf?src-supplier=Digi-Key, ComponentLink2Description=https://datasheet.ciiva.com/15922/1134umk212b7224kg-t-15922643.pdf?src-supplier=Onlinecomponents.com, ComponentLink2URL=https://datasheet.ciiva.com/15922/1134umk212b7224kg-t-15922643.pdf?src-supplier=Onlinecomponents.com, ComponentLink3Description=https://datasheet.ciiva.com/30106/209umk212b7224kg-t-30106923.pdf?src-supplier=Onlinecomponents.com, ComponentLink3URL=https://datasheet.ciiva.com/30106/209umk212b7224kg-t-30106923.pdf?src-supplier=Onlinecomponents.com, ComponentLink4Description=https://datasheet.ciiva.com/30164/55umk212b7224kg-t-30164219.pdf?src-supplier=Onlinecomponents.com, ComponentLink4URL=https://datasheet.ciiva.com/30164/55umk212b7224kg-t-30164219.pdf?src-supplier=Onlinecomponents.com, ComponentLink5Description=https://datasheet.ciiva.com/15165/getdatasheetpartid-63436-15165368.pdf?src-supplier=Verical, ComponentLink5URL=https://datasheet.ciiva.com/15165/getdatasheetpartid-63436-15165368.pdf?src-supplier=Verical, ComponentLink6Description=https://datasheet.ciiva.com/28645/746258-28645309.pdf?src-supplier=Element14, ComponentLink6URL=https://datasheet.ciiva.com/28645/746258-28645309.pdf?src-supplier=Element14, Construction=Flat, Contact Plating=Nickel, Depth=1.25mm, Halogen Free="Halogen Free", Height=1.25mm, Length=2mm, Manufacturer Part Number=UMK212B7224KG-T, Mount="Surface Mount", Packaging="Tape and Reel", Pricing 1="1=0.15000, 10=0.10600, 50=0.06040, 100=0.05000, 500=0.03508, 1000=0.02904 (USD)", Radiation Hardening=No, REACH SVHC=Unknown, RoHS=Yes, RoHS Compliant=Yes, Series=M, Stock 1=141709, Supplier 1=Digi-Key, Termination=SMD/SMT, Thickness=0.053inch, Voltage Rating=50V, Voltage Rating (DC)=50V, Width=0.049inch
C9 C10: library part T530X337M010ATE004, "Tantalum Capacitors - Polymer SMD 330uF 10volts 20%", Capacitance=330uF, Case Code (Imperial)=2917, Case Code (Metric)=7343, ESR (Equivalent Series Resistance)=4mR, Leakage Current=330uA, Manufacturer=KEMET, Max Operating Temperature=125°C, Min Operating Temperature=-55°C, Package Quantity=500, Ripple Current=8.2A, Supplier Part Number 1=2442694, Tolerance=20%, Voltage=10V, Case/Package=2917, Category="Polymer Capacitors", ComponentLink1Description=https://datasheet.ciiva.com/11794/0900766b80deaa91-11794477.pdf?src-supplier=RSComponents, ComponentLink1URL=https://datasheet.ciiva.com/11794/0900766b80deaa91-11794477.pdf?src-supplier=RSComponents, ComponentLink2Description=https://datasheet.ciiva.com/14593/70096008-14593753.pdf?src-supplier=Allied+Electronics, ComponentLink2URL=https://datasheet.ciiva.com/14593/70096008-14593753.pdf?src-supplier=Allied+Electronics, Construction=Flat, Depth=4.3mm, Dissipation Factor=8%, Features="General Purpose", Height=4mm, Height - Seated (Max)=0.169inch, Length=7.3mm, Life (Hours)=2000Hour, Manufacturer Part Number=T530X337M010ATE004, Mount="Surface Mount,PCB", Packaging="Tape and Reel", Polarity=Polar, Pricing 1="1=7.94000, 10=5.39000, 50=4.71000, 100=4.31000, 200=4.23000 (EUR)", REACH SVHC="No SVHC", RoHS=Yes, RoHS Compliant=Yes, Series=T530, Stock 1=1, Supplier 1=Farnell, Termination=SMD/SMT, Voltage Rating=10V, Voltage Rating (DC)=10V, Width=4.3mm
J1 J2 J3 J4 J5 J6: library part PAD_WITH_HOLE_4MMx1.5MM, "Pad with a hole 4mm x 1.5mm"
L1: library part 744313330, "WURTH ELEKTRONIK - 744313330 - INDUCTOR, HIGH CURRENT 2.45UH, SMD", Case/Package=Nonstandard, Current Rating=12A, DC Resistance (DCR)=8.1mR, Inductance=3.3uH, Inductance Tolerance=20%, Manufacturer="Wurth Electronics", Max Operating Temperature=150°C, Min Operating Temperature=-40°C, Package Quantity=1, Resistor Type=Wirewound, Saturation Current=14A, Self Resonant Frequency=30MHz, Supplier Part Number 1=732-3868-1-ND, Test Frequency=100kHz, Category="Fixed Inductors", ComponentLink1Description=https://datasheet.ciiva.com/13320/744313330-77882-13320833.pdf?src-supplier=Mouser, ComponentLink1URL=https://datasheet.ciiva.com/13320/744313330-77882-13320833.pdf?src-supplier=Mouser, ComponentLink2Description=https://datasheet.ciiva.com/6693/744313330-6693493.pdf?src-supplier=Digi-Key, ComponentLink2URL=https://datasheet.ciiva.com/6693/744313330-6693493.pdf?src-supplier=Digi-Key, ComponentLink3Description=https://datasheet.ciiva.com/7765/1735753-7765018.pdf?src-supplier=Element14, ComponentLink3URL=https://datasheet.ciiva.com/7765/1735753-7765018.pdf?src-supplier=Element14, ComponentLink4Description=https://datasheet.ciiva.com/6693/744313330-6693495.pdf?src-supplier=Digi-Key, ComponentLink4URL=https://datasheet.ciiva.com/6693/744313330-6693495.pdf?src-supplier=Digi-Key, ComponentLink5Description=https://datasheet.ciiva.com/6693/744313330-6693496.pdf?src-supplier=Digi-Key, ComponentLink5URL=https://datasheet.ciiva.com/6693/744313330-6693496.pdf?src-supplier=Digi-Key, Height=3.3mm, Height - Seated (Max)=0.138inch, Lead Free="Lead Free", Length=0.504inch, Manufacturer Part Number=744313330, Max DC Current=12A, Mount="Surface Mount", Number of Pins=2, Packaging="Tape and Reel", Pricing 1="1=4.01000, 10=3.93100, 50=3.62900, 100=3.47800, 200=3.25100 (USD)", REACH SVHC=Unknown, RMS Current (Irms)=12A, RoHS=Yes, RoHS Compliant=Yes, Series=WE-HCI, Shielding=Shielded, Stock 1=257, Supplier 1=Digi-Key, Termination=SMD/SMT, Tolerance=20%, Width=12.8mm
L2: library part ETQP4M2R2KVC, "Power Choke Shielded Wirewound 2.2uH 20% 100KHz Metal 14.8A 0.00748Ohm DCR Automotive T/R", DC Resistance (DCR)=7.48mR, Inductance=2.2uH, Inductance Tolerance=20%, Manufacturer=Panasonic, RMS Current (Irms)=12.1A, Saturation Current=21A, Supplier Part Number 1=PCD2462CT-ND, Category="Fixed Inductors", ComponentLink1Description=https://media.digikey.com/pdf/Data%20Sheets/Panasonic%20Inductors%20Coils%20Filters%20PDFs/ETQ-P_Series_NPI.pdf?src-supplier=Digi-Key, ComponentLink1URL=https://media.digikey.com/pdf/Data%20Sheets/Panasonic%20Inductors%20Coils%20Filters%20PDFs/ETQ-P_Series_NPI.pdf?src-supplier=Digi-Key, ComponentLink2Description=http://www.farnell.com/datasheets/2144948.pdf?src-supplier=Element14, ComponentLink2URL=http://www.farnell.com/datasheets/2144948.pdf?src-supplier=Element14, Manufacturer Part Number=ETQP4M2R2KVC, Mount="Surface Mount", Packaging="Cut Tape", Pricing 1="1=1.16000, 10=1.07700, 25=0.99400, 50=0.82840, 100=0.77860, 250=0.69576 (USD)", REACH SVHC=Unknown, RoHS=Yes, RoHS Compliant=Yes, Stock 1=71, Supplier 1=Digi-Key
Q1 Q2: "MOSFET 2N-CH 30V 5.8A 8-SOIC", Case/Package=SO, Continuous Drain Current (ID)=8.2A, Drain to Source Resistance=11.5mR, Drain to Source Voltage (Vdss)=30V, Drain-source On Resistance-Max=18.5mR, Gate to Source Voltage (Vgs)=20V, Manufacturer="Vishay Siliconix", Max Operating Temperature=150°C, Max Power Dissipation=1.25W, Min Operating Temperature=-55°C, Package Quantity=1, Supplier Part Number 1=SI4816BDY-T1-E3CT-ND, Threshold Voltage=1V, Category=MOSFETs, ComponentLink1Description=https://datasheet.ciiva.com/15137/getdatasheetpartid-99188-15137841.pdf?src-supplier=Verical, ComponentLink1URL=https://datasheet.ciiva.com/15137/getdatasheetpartid-99188-15137841.pdf?src-supplier=Verical, ComponentLink2Description=https://datasheet.ciiva.com/7710/si4816bd-7710449.pdf?src-supplier=Element14, ComponentLink2URL=https://datasheet.ciiva.com/7710/si4816bd-7710449.pdf?src-supplier=Element14, ComponentLink3Description=https://datasheet.ciiva.com/26789/si4816bdy-t1-e3-26789112.pdf?src-supplier=IIIC, ComponentLink3URL=https://datasheet.ciiva.com/26789/si4816bdy-t1-e3-26789112.pdf?src-supplier=IIIC, ComponentLink4Description=https://datasheet.ciiva.com/11161/si4816bd-11161496.pdf?src-supplier=Avnet, ComponentLink4URL=https://datasheet.ciiva.com/11161/si4816bd-11161496.pdf?src-supplier=Avnet, ComponentLink5Description=https://datasheet.ciiva.com/928/si4816bd-928460.pdf?src-supplier=Digi-Key, ComponentLink5URL=https://datasheet.ciiva.com/928/si4816bd-928460.pdf?src-supplier=Digi-Key, ComponentLink6Description=https://datasheet.ciiva.com/16486/si4816bd-16486349.pdf?src-supplier=Future+Electronics, ComponentLink6URL=https://datasheet.ciiva.com/16486/si4816bd-16486349.pdf?src-supplier=Future+Electronics, ComponentLink7Description=https://datasheet.ciiva.com/26136/si4816bd-26136990.pdf?src-supplier=Avnet+Europe, ComponentLink7URL=https://datasheet.ciiva.com/26136/si4816bd-26136990.pdf?src-supplier=Avnet+Europe, ComponentLink8Description=https://datasheet.ciiva.com/18448/70026226-18448822.pdf?src-supplier=Allied+Electronics, ComponentLink8URL=https://datasheet.ciiva.com/18448/70026226-18448822.pdf?src-supplier=Allied+Electronics, ComponentLink9Description=https://datasheet.ciiva.com/928/si4816bd-928458.pdf?src-supplier=Digi-Key, ComponentLink9URL=https://datasheet.ciiva.com/928/si4816bd-928458.pdf?src-supplier=Digi-Key, ComponentLink10Description=https://datasheet.ciiva.com/928/si4816bd-928459.pdf?src-supplier=Digi-Key, ComponentLink10URL=https://datasheet.ciiva.com/928/si4816bd-928459.pdf?src-supplier=Digi-Key, Element Configuration=Single, Fall Time=9ns, FET Type="2 N-Channel", Height=1.55mm, Lead Free="Lead Free", Length=5mm, Manufacturer Part Number=SI4816BDY-T1-E3, Mount="Surface Mount", Nominal Vgs=3V, Number of Channels=2, Number of Elements=2, Number of Pins=8, On-State Resistance=18.5mR, Packaging="Tape and Reel", Polarity=N-CHANNEL, Pricing 1="1=1.72000, 10=1.54500, 25=1.45760, 100=1.24180, 500=1.02024, 1000=0.87450 (USD)", Radiation Hardening=No, Rds On Max=18.5mR, REACH SVHC=Unknown, Rise Time=9ns, RoHS=Yes, RoHS Compliant=Yes, Series="LITTLE FOOT®", Stock 1=74, Supplier 1=Digi-Key, Turn-Off Delay Time=31ns, Turn-On Delay Time=13ns, Weight=0.006596oz, Width=4mm
R1 R3 R12 R15: library part RMCF0805ZT0R00, "STACKPOLE ELECTRONICS - RMCF0805ZT0R00. - RES THKFLM 0805 0 OHM JUMPER 1/8W 200PPM/ C SMD ROHS COMPLIANT: YES", Case Code (Imperial)=0805, Case Code (Metric)=2012, Manufacturer="Stackpole Electronics", Max Operating Temperature=155°C, Max Power Dissipation=125mW, Min Operating Temperature=-55°C, Resistor Type="Thick Film", Supplier Part Number 1=RMCF0805ZT0R00CT-ND, Case/Package=0805, Category="Chip SMD Resistors", ComponentLink1Description=https://datasheet.ciiva.com/15193/getdatasheetpartid-360417-15193658.pdf?src-supplier=Verical, ComponentLink1URL=https://datasheet.ciiva.com/15193/getdatasheetpartid-360417-15193658.pdf?src-supplier=Verical, Construction=Rectangular, Contact Plating=Tin,Matte, Depth=1.25mm, Features="Automotive AEC-Q200", Height=0.026inch, Lead Free="Lead Free", Length=2mm, Manufacturer Part Number=RMCF0805ZT0R00, Military Standard=Not, Mount="Surface Mount", Number of Terminations=2, Packaging="Tape and Reel", Power Rating=125mW, Pricing 1="1=0.10000, 10=0.01700, 25=0.01280, 50=0.00960, 100=0.00710, 250=0.00540, 500=0.00432, 1000=0.00318 (USD)", Radiation Hardening=No, Resistance=0R, RoHS=Yes, RoHS Compliant=Yes, Series=RMCF, Size Code=0805, Stock 1=2506883, Supplier 1=Digi-Key, Width=0.049inch
R2 R10 R13: library part RNCF0805AKT10R0, "Res Thin Film 0805 10 Ohm 0.05% 1/10W 10ppm/C Molded SMD SMD Paper T/R", Case Code (Imperial)=0805, Case Code (Metric)=2012, Manufacturer="Stackpole Electronics", Max Operating Temperature=155°C, Max Power Dissipation=125mW, Min Operating Temperature=-55°C, Package Quantity=1000, Resistor Type="Thin Film", Supplier Part Number 1=RNCF0805AKT10R0CT-ND, Temperature Coefficient=10ppm/°C, Tolerance=0.05%, Case/Package=0805, Category="Chip SMD Resistors", ComponentLink1Description=https://www.seielect.com/catalog/sei-rncf.pdf?src-supplier=Digi-Key, ComponentLink1URL=https://www.seielect.com/catalog/sei-rncf.pdf?src-supplier=Digi-Key, ComponentLink2Description=https://www.seielect.com/Catalog/SEI-rncf.pdf?src-supplier=Avnet, ComponentLink2URL=https://www.seielect.com/Catalog/SEI-rncf.pdf?src-supplier=Avnet, Contact Plating=Tin,Matte, Features="Moisture Resistant", Height=0.026inch, Length=0.079inch, Manufacturer Part Number=RNCF0805AKT10R0, Mount="Surface Mount", Number of Terminations=2, Packaging="Tape and Reel", Pricing 1="1=0.91000, 10=0.79200, 100=0.55200 (USD)", Radiation Hardening=No, Resistance=10R, RoHS=Yes, RoHS Compliant=Yes, Series=RNCF, Stock 1=8702, Supplier 1=Digi-Key, Width=0.049inch
R4 R5: library part ERJ-6RQF1R0V, "SISTOR, THICK FILM, 1 OHM, 125mW, 1%; Product Range:PANASONIC - ERJ Series; Resistance:1ohm; Power Rating:125mW; Resistance Tolerance:± 1%; Resistor Case Style:0805 ^2012 Metric]; Resistor Element Type:Thick Film; MSL:-", Case Code (Imperial)=0805, Case Code (Metric)=2012, Manufacturer=Panasonic, Max Operating Temperature=125°C, Max Power Dissipation=125mW, Min Operating Temperature=-55°C, Package Quantity=5000, Resistance Tolerance=1%, Resistor Type="Thick Film", Supplier Part Number 1=P1.0DCT-ND, Temperature Coefficient=200ppm/°C, Case/Package=0805, Category="Chip SMD Resistors", ComponentLink1Description=https://datasheet.ciiva.com/11818/0900766b80eefa12-11818468.pdf?src-supplier=RSComponents, ComponentLink1URL=https://datasheet.ciiva.com/11818/0900766b80eefa12-11818468.pdf?src-supplier=RSComponents, ComponentLink2Description=https://datasheet.ciiva.com/36525/1381829-36525978.pdf?src-supplier=Jameco, ComponentLink2URL=https://datasheet.ciiva.com/36525/1381829-36525978.pdf?src-supplier=Jameco, ComponentLink3Description=https://datasheet.ciiva.com/46446/391509-46446341.pdf?src-supplier=Element14, ComponentLink3URL=https://datasheet.ciiva.com/46446/391509-46446341.pdf?src-supplier=Element14, ComponentLink4Description=https://datasheet.ciiva.com/28691/391509-28691990.pdf?src-supplier=Element14, ComponentLink4URL=https://datasheet.ciiva.com/28691/391509-28691990.pdf?src-supplier=Element14, ComponentLink5Description=https://datasheet.ciiva.com/16783/70068852-16783991.pdf?src-supplier=Allied+Electronics, ComponentLink5URL=https://datasheet.ciiva.com/16783/70068852-16783991.pdf?src-supplier=Allied+Electronics, ComponentLink6Description=https://datasheet.ciiva.com/9198/aoa0000ce3-9198856.pdf?src-supplier=Avnet, ComponentLink6URL=https://datasheet.ciiva.com/9198/aoa0000ce3-9198856.pdf?src-supplier=Avnet, ComponentLink7Description=https://datasheet.ciiva.com/17215/aoa0000ce3-17215193.pdf?src-supplier=Avnet+Europe, ComponentLink7URL=https://datasheet.ciiva.com/17215/aoa0000ce3-17215193.pdf?src-supplier=Avnet+Europe, ComponentLink8Description=https://datasheet.ciiva.com/16507/aoa0000ce3-16507437.pdf?src-supplier=Future+Electronics, ComponentLink8URL=https://datasheet.ciiva.com/16507/aoa0000ce3-16507437.pdf?src-supplier=Future+Electronics, Construction=Rectangular, Contact Plating=Tin, Depth=1.25mm, Height=0.6mm, Lead Free="Lead Free", Length=2mm, Manufacturer Part Number=ERJ-6RQF1R0V, Military Standard=Not, Mount="Surface Mount", Number of Pins=2, Number of Terminations=2, Packaging="Tape and Reel", Power Rating=125mW, Pricing 1="1=0.32000, 10=0.27000, 25=0.19600, 50=0.14200, 100=0.10540, 250=0.08084, 500=0.06370, 1000=0.04410 (USD)", Radiation Hardening=No, REACH SVHC="No SVHC", Resistance=1R, RoHS=Yes, RoHS Compliant=Yes, Series=ERJ, Size Code=0805, Stock 1=27352, Supplier 1=Digi-Key, Technology="THICK FILM", Termination=SMD/SMT, Tolerance=1%, Width=1.2mm
R6 R7 R8 R9: library part ERJ-6ENF2003V, "PANASONIC ELECTRONIC COMPONENTS         ERJ6ENF2003V            Surface Mount Chip Resistor, Thick Film, AEC-Q200 ERJ6E Series, 200 kohm, 125 mW,  1%, 150 V", Case Code (Imperial)=0805, Case Code (Metric)=2012, Manufacturer=Panasonic, Max Operating Temperature=155°C, Max Power Dissipation=125mW, Min Operating Temperature=-55°C, Package Quantity=1, Resistance=200kR, Resistance Tolerance=1%, Resistor Type="Thick Film", Supplier Part Number 1=P200KCCT-ND, Temperature Coefficient=100ppm/°C, Voltage Rating=150V, Case/Package=0805, Category="Chip SMD Resistors", ComponentLink1Description=https://datasheet.ciiva.com/3883/3984280s8821682n1386-3883650.pdf?src-supplier=Arrow+Electronics, ComponentLink1URL=https://datasheet.ciiva.com/3883/3984280s8821682n1386-3883650.pdf?src-supplier=Arrow+Electronics, ComponentLink2Description=https://datasheet.ciiva.com/11821/0900766b80f80784-11821569.pdf?src-supplier=RSComponents, ComponentLink2URL=https://datasheet.ciiva.com/11821/0900766b80f80784-11821569.pdf?src-supplier=RSComponents, ComponentLink3Description=https://datasheet.ciiva.com/24070/aoa0000ce2-24070837.pdf?src-supplier=Mouser, ComponentLink3URL=https://datasheet.ciiva.com/24070/aoa0000ce2-24070837.pdf?src-supplier=Mouser, ComponentLink4Description=https://datasheet.ciiva.com/30251/aoa0000ce2-30251689.pdf?src-supplier=Onlinecomponents.com, ComponentLink4URL=https://datasheet.ciiva.com/30251/aoa0000ce2-30251689.pdf?src-supplier=Onlinecomponents.com, ComponentLink5Description=https://datasheet.ciiva.com/5868/426256-5868186.pdf?src-supplier=Farnell, ComponentLink5URL=https://datasheet.ciiva.com/5868/426256-5868186.pdf?src-supplier=Farnell, ComponentLink6Description=https://datasheet.ciiva.com/28675/1678782-28675835.pdf?src-supplier=Element14, ComponentLink6URL=https://datasheet.ciiva.com/28675/1678782-28675835.pdf?src-supplier=Element14, ComponentLink7Description=https://datasheet.ciiva.com/16427/aoa0000ce2-16427100.pdf?src-supplier=Future+Electronics, ComponentLink7URL=https://datasheet.ciiva.com/16427/aoa0000ce2-16427100.pdf?src-supplier=Future+Electronics, ComponentLink8Description=https://datasheet.ciiva.com/28577/1678782-28577790.pdf?src-supplier=Element14, ComponentLink8URL=https://datasheet.ciiva.com/28577/1678782-28577790.pdf?src-supplier=Element14, ComponentLink9Description=https://datasheet.ciiva.com/46374/426256-46374223.pdf?src-supplier=Element14, ComponentLink9URL=https://datasheet.ciiva.com/46374/426256-46374223.pdf?src-supplier=Element14, Construction=Rectangular, Contact Plating=Tin, Depth=1.25mm, Features="Automotive AEC-Q200", Height=0.6mm, Lead Free="Lead Free", Length=2mm, Manufacturer Part Number=ERJ-6ENF2003V, Military Standard=Not, Mount="Surface Mount", Number of Terminations=2, Packaging="Tape and Reel", Power Rating=125mW, Pricing 1="1=0.10000, 10=0.07500, 100=0.02880, 1000=0.01265, 2500=0.01092 (USD)", Radiation Hardening=No, REACH SVHC="No SVHC", RoHS=Yes, RoHS Compliant=Yes, Series=ERJ, Size Code=0805, Stock 1=18321, Supplier 1=Digi-Key, Technology="THICK FILM", Termination=SMD/SMT, Tolerance=1%, Voltage Rating (DC)=150V, Width=1.2mm
R11 R14 R16 R17 R18: library part RES
U1: "IC MAIN PWR CTRLR QUAD 32-QFN", Case/Package=QFN, Manufacturer=Intersil, Max Operating Temperature=100°C, Min Operating Temperature=-40°C, Output Current=20A, Package Quantity=60, Supplier Part Number 1=52M5562, Switching Frequency=500kHz, Category="Voltage Regulators - Switching", ComponentLink1Description=https://datasheet.ciiva.com/25905/fn6453-25905351.pdf?src-supplier=Avnet+Europe, ComponentLink1URL=https://datasheet.ciiva.com/25905/fn6453-25905351.pdf?src-supplier=Avnet+Europe, Height=0.95mm, Lead Free="Lead Free", Length=5mm, Manufacturer Part Number=ISL6236AIRZ, Mount="Surface Mount", Number of Outputs=4, Packaging=Rail/Tube, Radiation Hardening=No, RoHS=Yes, RoHS Compliant=Yes, Supplier 1=Newark, Width=5mm

## Via types
v1: diameter 0.6, hole 0.3, Top Layer (L1) to Bottom Layer (L6), tented both sides, 105 vias

## Nets (pads, with @x,y where several pads share a name; then routed paths per layer and width w, separated by ;. In a path a pad name is that pad's centre, name@x,y a point inside that pad or via, vN(x,y) a via of type N, cw(c..) or ccw(c..) an arc to the next point about the centre after c; other vN are vias at no path point)
"1.05 V": C10.1 J4.1 L2.2 U1.30 | length 12.9
  L3 w0.7: v1(25.6,39.2) 25.6,37.3 27,35.9 27,30.4 v1(26.287,29.687)
  Bottom Layer (L6) w0.2: U1.30 25.75,28.107 26.287,28.645 v1(26.287,29.687)
+1.5V: C9.1 J3.1 L1.1 R11.2 U1.10 | length 15.1
  Top Layer (L1) w0.2: L1.1 L1.1@28.5,11.025 ; v1@33.4,10.9 v1(33.6,10.9)
  L3 w1: v1(31.2,14.7) 33.6,12.3 v1(33.6,10.9)
  Bottom Layer (L6) w0.254: U1.10 26.25,21.917 26.353,21.815 26.353,21.747 27.3,20.8 ; 30.651,17.1 30.8,16.951 ; R11.2@30.8,15.873 31.023,15.65 R11.2 v1@31.1,14.7
  Bottom Layer (L6) w0.5: 27.3,20.8 27.3,20.451 30.651,17.1 ; R11.2@30.8,15.873 30.8,16.951
"+5 PVCC": C3.2 R1.1 R2.1 R3.2 U1.19 | length 18.5
  Bottom Layer (L6) w0.2: 21.587,24.473 21.81,24.25 U1.19
  Bottom Layer (L6) w0.254: C3.2@19.45,25.8 19.45,25.6 19.773,25.277 20.577,24.473 21.587,24.473
  Bottom Layer (L6) w0.7: R1.1 12.25,20.8 R3.2 R2.1 12.25,26.6 13,27.35 18.79,27.35 19.35,26.79 C3.2@19.35,25.9
"+5V LDO": C2.2 R1.2 U1.7 | length 35.7
  L3 w0.254: v1(30.461,18.642) v1(30.461,18.642)
  L3 w0.7: v1(8.4,20.5) 10.172,22.272 26.83,22.272 29.35,19.752 29.352,19.752 v1(30.461,18.642)
  Bottom Layer (L6) w0.2: U1.7 28.556,23.75
  Bottom Layer (L6) w0.254: 29.4,22.906 29.5,22.806
  Bottom Layer (L6) w0.3: 28.556,23.75 29.4,22.906
  Bottom Layer (L6) w0.5: v1(8.4,20.5) R1.2@10.25,20.5 ; 29.5,22.806 29.5,20.9 C2.2@31.95,18.45 ; v1(30.461,18.642) 31.004,18.1 C2.2
"+5V VCC": C1.2 R2.2 R8.2 R9.2 R10.1 R12.2 R13.1 R16.2 U1.2 U1.3 U1.20 | length 24.3
  Bottom Layer (L6) w0.2: v1(21.1,25.1) 21.177,25.023 21.64,25.023 21.899,24.765 22.585,24.765 U1.20
  Bottom Layer (L6) w0.254: U1.3 29.95,25.75 30.154,25.954 ; U1.2 27.777,26.25 28.027,26.5 v1(28.715,26.5)
  Bottom Layer (L6) w0.4: v1(15.9,33.9) R8.2 ; v1(15.9,36.4) R9.2 ; R16.2 29.75,36 v1(31,36) ; 30.154,25.954 31.4,27.2 32.3,27.2 34.2,29.1 C1.2 34.3,29.4 v1(34.3,30.4) ; v1(32.227,34.7) R10.1
  Bottom Layer (L6) w0.5: v1(8.5,26.3) R2.2 ; v1(22,14.6) R13.1 ; v1(27,14.935) R12.2
+VIN: C4.2 C5.2 C6.2 J1.1 Q1.8 Q2.8 R3.1 U1.6 | length 12.4
  Top Layer (L1) w0.2: J1.1@4,29 J1.1@4.3,29 ; v1(8.5,23.2) v1@8.55,23.15 ; C4.2 12.65,18 C4.2@13,18.35
  Bottom Layer (L6) w0.2: U1.6 29.205,24.25 30.029,23.426
  Bottom Layer (L6) w0.254: 30.029,23.426 30.374,23.426 30.8,23 30.8,21.3 31.2,20.9 C5.2 32.05,21.1 33.15,22.2 v1(33.175,22.2) v1@33.2,22.2
  Bottom Layer (L6) w0.5: v1(8.5,23.2) R3.1
EN1: R13.2 U1.14 | length 5.2
  Bottom Layer (L6) w0.254: R13.2 22,19.616 24.25,21.866 U1.14
"EN LDO": R10.2 U1.4 | length 20.9
  Bottom Layer (L6) w0.254: U1.4 30.65,25.25 31.6,26.2 32.662,26.2 34.977,28.515 34.977,30.077 35.4,30.5 37.9,30.5 38.1,30.7 38.1,34.151 37.951,34.3 R10.2@36.173,34.3 ; R10.2 35.95,34.4 36.112,34.238 36.85,33.5 v1(36.9,33.5)
FB1: R11.1 R12.1 R17.2 U1.11 | length 14.5
  Bottom Layer (L6) w0.2: U1.11 25.75,21.601 25.776,21.576
  Bottom Layer (L6) w0.254: 26.951,19.2 27.1,19.051 ; R12.1 R12.1@27.1,17.85
  Bottom Layer (L6) w0.5: 25.776,21.576 25.776,20.376 26.951,19.2 ; R12.1@27.1,17.75 27.3,17.75 27.4,17.65 27.4,17.6 29.5,15.5 29.5,14.149 29.899,13.75 R11.1 R17.2 ; R12.1@27.1,17.85 27.1,19.051
GND: C1.1 C2.1 C3.1 C4.1 C5.1 C6.1 C9.2 C10.2 C11.2 C12.2 J2.1 J5.1 J6.1 Q1.2 Q1.3 Q2.2 Q2.3 R6.2 R7.1 R17.1 R18.1 U1.8 U1.21 U1.22 U1.29 U1.33 | length 15.2
  Bottom Layer (L6) w0.2: U1.21 23.15,25.25 U1.33@23.65,25.75 ; U1.22 U1.33@23.65,25.75 ; v1(24,26.1) U1.33@23.65,25.75 ; U1.29 25.25,28.225 25.423,28.398 25.423,30.223 v1(25.5,30.3) ; U1.8 27.585,23.25 27.6,23.235 27.6,23.05 ; v1@28.073,22.577 28.223,22.577 v1(28.3,22.5) ; R18.1 R18.1@29.6,41.35
  Bottom Layer (L6) w0.254: C5.1 33.95,21 C5.1@33.95,21.1 ; C2.1@35.05,17.75 C2.1 C2.1@35.05,18.45 ; C11.2 C11.2@35.25,25
  Bottom Layer (L6) w0.4: 27.6,23.05 v1@28.073,22.577 ; R17.1 v1(34.958,15.65)
  Bottom Layer (L6) w0.5: v1(24.5,14.6) R7.1 ; v1(26.1,31.7) 26.45,31.35 R6.2 ; R18.1@29.6,41.35 v1(29.6,42.6)
  other v1: 4.4,5.8 5.8,5.8 5.1,6.4 4.4,7.2 5.8,7.2 5,7.9 4.4,8.7 5.8,8.7 5,9.6 4.4,10.6 5.7,10.6 5.1,11.4 7.3,11.6 4.4,12.3 5.7,12.3 7.3,12.4 39.1,15.5 43,15.5 8.2,16.3 43,17 39.2,17.1 8.2,17.2 36.1,17.7 8.2,18.1 36.062,18.5 39.1,18.5 43,18.6 34.8,20.6 34.8,21.3 36.5,23.5 24,24 26,24 36.5,25.1 16.4,25.8 26,26.1 16.4,26.5 37,28.9 37,29.7 36.8,31.6 39.1,32.159 42.8,32.2 36.8,32.4 39.1,33.619 42.8,33.6 5.8,34.3 7.2,34.3 6.5,34.9 39.1,35.2 42.8,35.2 5.8,35.7 7.2,35.7 6.4,36.4 5.8,37.2 7.2,37.2 6.4,38.1 5.8,39.1 7.1,39.1 6.5,39.9 8.488,39.9 5.8,40.8 7.1,40.8 8.488,40.882 17.5,44.8 17.5,45.8 17.5,46.9
LGATE1: Q1.4 U1.18 | length 47.1
  Top Layer (L1) w0.4: v1(6.808,10.12) Q1.4@8.598,10.12
  L3 w1: v1(6.808,10.12) 6.9,10.028 6.9,5.286 6.314,4.7 3.686,4.7 3,5.386 3,14.414 3.586,15 6.2,17.614 6.2,22.3 7.5,23.6 7.5,23.614 8.086,24.2 8.1,24.2 8.6,24.7 18.8,24.7 19.75,23.75 v1(21.15,23.75)
  Bottom Layer (L6) w0.25: v1(21.15,23.75) U1.18
LGATE2: Q2.4 U1.23 | length 21.2
  Top Layer (L1) w0.5: v1(8.323,38.595) Q2.4
  L3 w1: v1(8.323,38.595) 19.818,27.1 v1(21.1,27.1)
  Bottom Layer (L6) w0.2: v1(21.1,27.1) 21.349,27.1 22.199,26.25 U1.23
NetC7_2: C7.2 R4.1 | length 2.7
  Bottom Layer (L6) w0.2: C7.2 R4.1
NetC8_1: C8.1 R5.2 | length 3.8
  Bottom Layer (L6) w0.254: R5.2@17.6,28.65 17.55,28.6 17.55,30.75 18,31.2 18.65,31.2 18.75,31.3 C8.1@18.85,31.4
NetR4_2: R4.2 U1.17 | length 3.3
  Bottom Layer (L6) w0.2: R4.2 21.865,22.7 22.415,23.25 U1.17
NetR5_1: R5.1 U1.24 | length 3.9
  Bottom Layer (L6) w0.2: R5.1@19.45,28.6 20.589,28.6 U1.24@22.415,26.774
  Bottom Layer (L6) w0.254: U1.24@22.415,26.774 22.439,26.75 U1.24
NetR6_1: R6.1 U1.31 | length 2.9
  Bottom Layer (L6) w0.2: 26.262,27.818 27.027,28.583 27.027,28.877 R6.1@27.6,29.45
  Bottom Layer (L6) w0.254: U1.31 26.262,27.412 26.262,27.818 ; R6.1@27.6,29.45 R6.1
NetR7_2: R7.2 U1.12 | length 4.6
  Bottom Layer (L6) w0.2: R7.2 24.5,20.131 25.226,20.857 25.226,21.803 25.25,21.828 U1.12
PHASE1: C7.1 L1.2 Q1.5 Q1.6 Q1.7 U1.16 | length 17.6
  Top Layer (L1) w0.2: v1@15.1,12.4 v1(15.3,12.4) ; L1.2@16.725,12.4 L1.2
  L3 w1: v1(15.3,12.4) 17.2,12.4 19.55,14.75 v1(19.55,17.324)
  Bottom Layer (L6) w0.2: 22.565,22.165 22.8,22.4 23.235,22.4 23.25,22.415 U1.16
  Bottom Layer (L6) w0.4: v1(19.55,17.324) C7.1 20.239,20 22.349,22.11 22.51,22.11
PHASE2: C8.2 L2.1 Q2.5 Q2.6 Q2.7 U1.25 | length 19.2
  Top Layer (L1) w0.2: L2.1@19.022,39.865 L2.1
  L3 w1: v1(17.125,39.865) 17.125,32.47 20.395,29.2 v1(21.7,29.2)
  Bottom Layer (L6) w0.2: 22.917,27.983 22.917,27.974 23.235,27.657 23.235,27.415 U1.25
  Bottom Layer (L6) w0.4: C8.2@20.65,31.3 20.65,30.25 v1(21.7,29.2) 22.917,27.983
POK1: R8.1 U1.13 U1.27 | length 46.2
  L3 w0.2: v1(22.75,33.7) 22.75,28.314 23.686,27.379 25.886,27.379 28.015,25.25 30.25,25.25 32.007,23.493 32.007,20.045 32.049,20.003
  L3 w0.254: v1(23.4,19.9) 26.2,19.9 28.9,17.2 31.9,17.2 32.049,17.349 32.049,20.003
  Bottom Layer (L6) w0.254: R8.1 22.55,33.9 v1(22.75,33.7) 22.75,30.95 23.6,30.1 23.787,30.1 24.377,29.51 24.377,28.99 24.25,28.863 U1.27 ; v1(23.4,19.9) 24.75,21.25 U1.13
POK2: R9.1 U1.28 | length 13.5
  Bottom Layer (L6) w0.254: R9.1 23.6,36.4 24.831,35.169 24.831,28.802 24.75,28.721 U1.28
REF: C12.1 R14.2 U1.1 | length 15.3
  Bottom Layer (L6) w0.254: U1.1 27.561,26.75 28.011,27.2 30.1,27.2 ; C12.1@34.1,32.1 C12.1
  Bottom Layer (L6) w0.5: R14.2 30.2,33.7 31.8,32.1 C12.1@34.1,32.1 ; 30.1,27.2 31.25,28.35 31.25,29.75 32.2,30.7 33.1,30.7 34.2,31.8 C12.1
REFIN2: R14.1 R15.1 R16.1 R18.2 U1.32 | length 17.3
  Bottom Layer (L6) w0.254: U1.32 26.75,27.561 27.389,28.2 ; R14.1@27.65,33.55 R14.1
  Bottom Layer (L6) w0.4: 27.389,28.2 29.4,28.2 29.85,28.65 29.85,31.2 27.65,33.4 R14.1@27.65,33.55 ; R14.1 R16.1 R15.1 R18.2
UGATE1: Q1.1 U1.15 | length 22.5
  Top Layer (L1) w0.4: v1(6.9,13.9) 6.902,13.902 8.771,13.902 Q1.1
  L3 w1: v1(6.9,13.9) 12.1,13.9 18.1,19.9 21.129,19.9 v1(21.239,20.01)
  Bottom Layer (L6) w0.2: v1(21.239,20.01) 21.499,20.01 23.735,22.246 23.735,22.585 U1.15
UGATE2: Q2.1 U1.26 | length 31.1
  Top Layer (L1) w0.4: Q2.1 Q2.1@10.223,42.405
  Top Layer (L1) w0.5: v1(8.373,42.405) Q2.1
  L3 w1: v1(8.373,42.405) 21.595,42.405 23.9,40.1 23.9,31.682 23.75,31.532 v1(23.75,29.25)
  Bottom Layer (L6) w0.2: U1.26 v1(23.75,29.25)
VREF3: C11.1 R15.2 U1.5 | length 34.4
  Bottom Layer (L6) w0.254: U1.5 30.35,24.75 30.9,24.2 ; R15.2 R15.2@29.75,38.6 ; 33.725,26.025 33.875,26.175
  Bottom Layer (L6) w0.5: 30.9,24.2 C11.1
  Bottom Layer (L6) w0.9: R15.2@29.75,38.6 37.6,38.6 40.1,36.1 40.1,28.3 37.9,26.1 33.8,26.1 ; C11.1@32.15,24.45 32.15,25 32.7,25 33.725,26.025
pads on no net: U1.9

## Polygon pours and split planes (outlines as drawn)
PHASE1 on Top Layer (L1) "PHASE1_L01_P000" (solid, pour order 0): 13,13.2 16,13.2 16,13.6 20.2,13.6 20.2,8.2 13,8.2
"1.05 V" on Top Layer (L1) "1.05_V_L01_P008" (solid, pour order 8): 24.6,41.8 49.3,41.8 49.3,36.9 24.6,36.9
+1.5V on Top Layer (L1) "+1.5V_L01_P042" (solid, pour order 42): 49.3,1.4 49.3,8.2 37.4,8.2 37.4,1.4
"1.05 V" on Top Layer (L1) "1.05_V_L01_P041" (solid, pour order 41): 49.3,41.7 49.3,48.5 37.4,48.5 37.4,41.7
+VIN on Top Layer (L1) "+VIN_L01_P040" (solid, pour order 40): 16.612,43.4 16.6,43.388 16.6,41.8 14,41.8 14,43.5 16.562,43.5 16.612,43.45
GND on Top Layer (L1) "GND_L01_P039" (solid, pour order 39): 9.37,12.915 9.37,11.085 6.415,11.085 6.3,11.085 6.3,5.4 3.9,5.4 3.9,12.9 9.356,12.9
GND on Top Layer (L1) "GND_L01_P037" (solid, pour order 37): 10.77,41.415 10.77,39.585 7.815,39.585 7.8,39.6 7.8,33.9 5.3,33.9 5.3,41.4 10.756,41.4
GND on Top Layer (L1) "GND_L01_P038" (solid, pour order 38): 8.6,41.5
GND on Top Layer (L1) "GND_L01_P024" (solid, pour order 24): 38.7,19.1 43.4,19.1 43.4,15 38.7,15
GND on Top Layer (L1) "GND_L01_P022" (solid, pour order 22): 38.6,35.8 43.3,35.8 43.3,31.7 38.6,31.7
GND on Top Layer (L1) "GND_L01_P021" (solid, pour order 21): 10.2,18.6 7.6,18.6 7.6,15.7 10.2,15.7
+VIN on Top Layer (L1) "+VIN_L01_P018" (solid, pour order 18): 17.3,47.3
+VIN on Top Layer (L1) "+VIN_L01_P017" (solid, pour order 17): 19.5,48.2
GND on Top Layer (L1) "GND_L01_P016" (solid, pour order 16): 15.6,47.7 18.7,47.7 18.7,44.3 15.6,44.3
+VIN on Top Layer (L1) "+VIN_L01_P015" (solid, pour order 15): 16.4,20.6
+VIN on Top Layer (L1) "+VIN_L01_P014" (solid, pour order 14): 8.5,22.3 11.534,22.3 11.534,13.5 14.9,13.5 14.909,13.509 14.909,24.7 9.805,24.7 6.905,27.6 5.6,27.6 4.4,26.4
+VIN on Top Layer (L1) "+VIN_L01_P013" (solid, pour order 13): 34.109,27.398 34.109,20.31 34.16,20.258 30.142,20.258 30.142,27.5
+VIN on Top Layer (L1) "+VIN_L01_P011" (solid, pour order 11): 15.2,27.398 34.109,27.398 34.109,31.389 11.2,31.398 5.1,31.4 5.1,43.4 16.612,43.4 16.612,43.5 14.7,43.5 14.7,47.7 0.6,47.7 0.6,26.3 7.3,26.3 7.3,27.398 11.2,27.398
no net on Top Layer (L1) "NONET_L01_P012" (solid, pour order 12): 11.2,31.3
+1.5V on Top Layer (L1) "+1.5V_L01_P010" (solid, pour order 10): 26.5,13.6 49.3,13.6 49.3,8.2 26.5,8.2
PHASE2 on Top Layer (L1) "PHASE2_L01_P003" (solid, pour order 3): 14.63,41.415 21.73,41.415 21.73,37.315 14.63,37.315
no net on Top Layer (L1) "NONET_L01_P005" (solid, pour order 5): 20.5,41.4